# Allegro board ECBMCU201MPC_VER_B_Allegro.brd
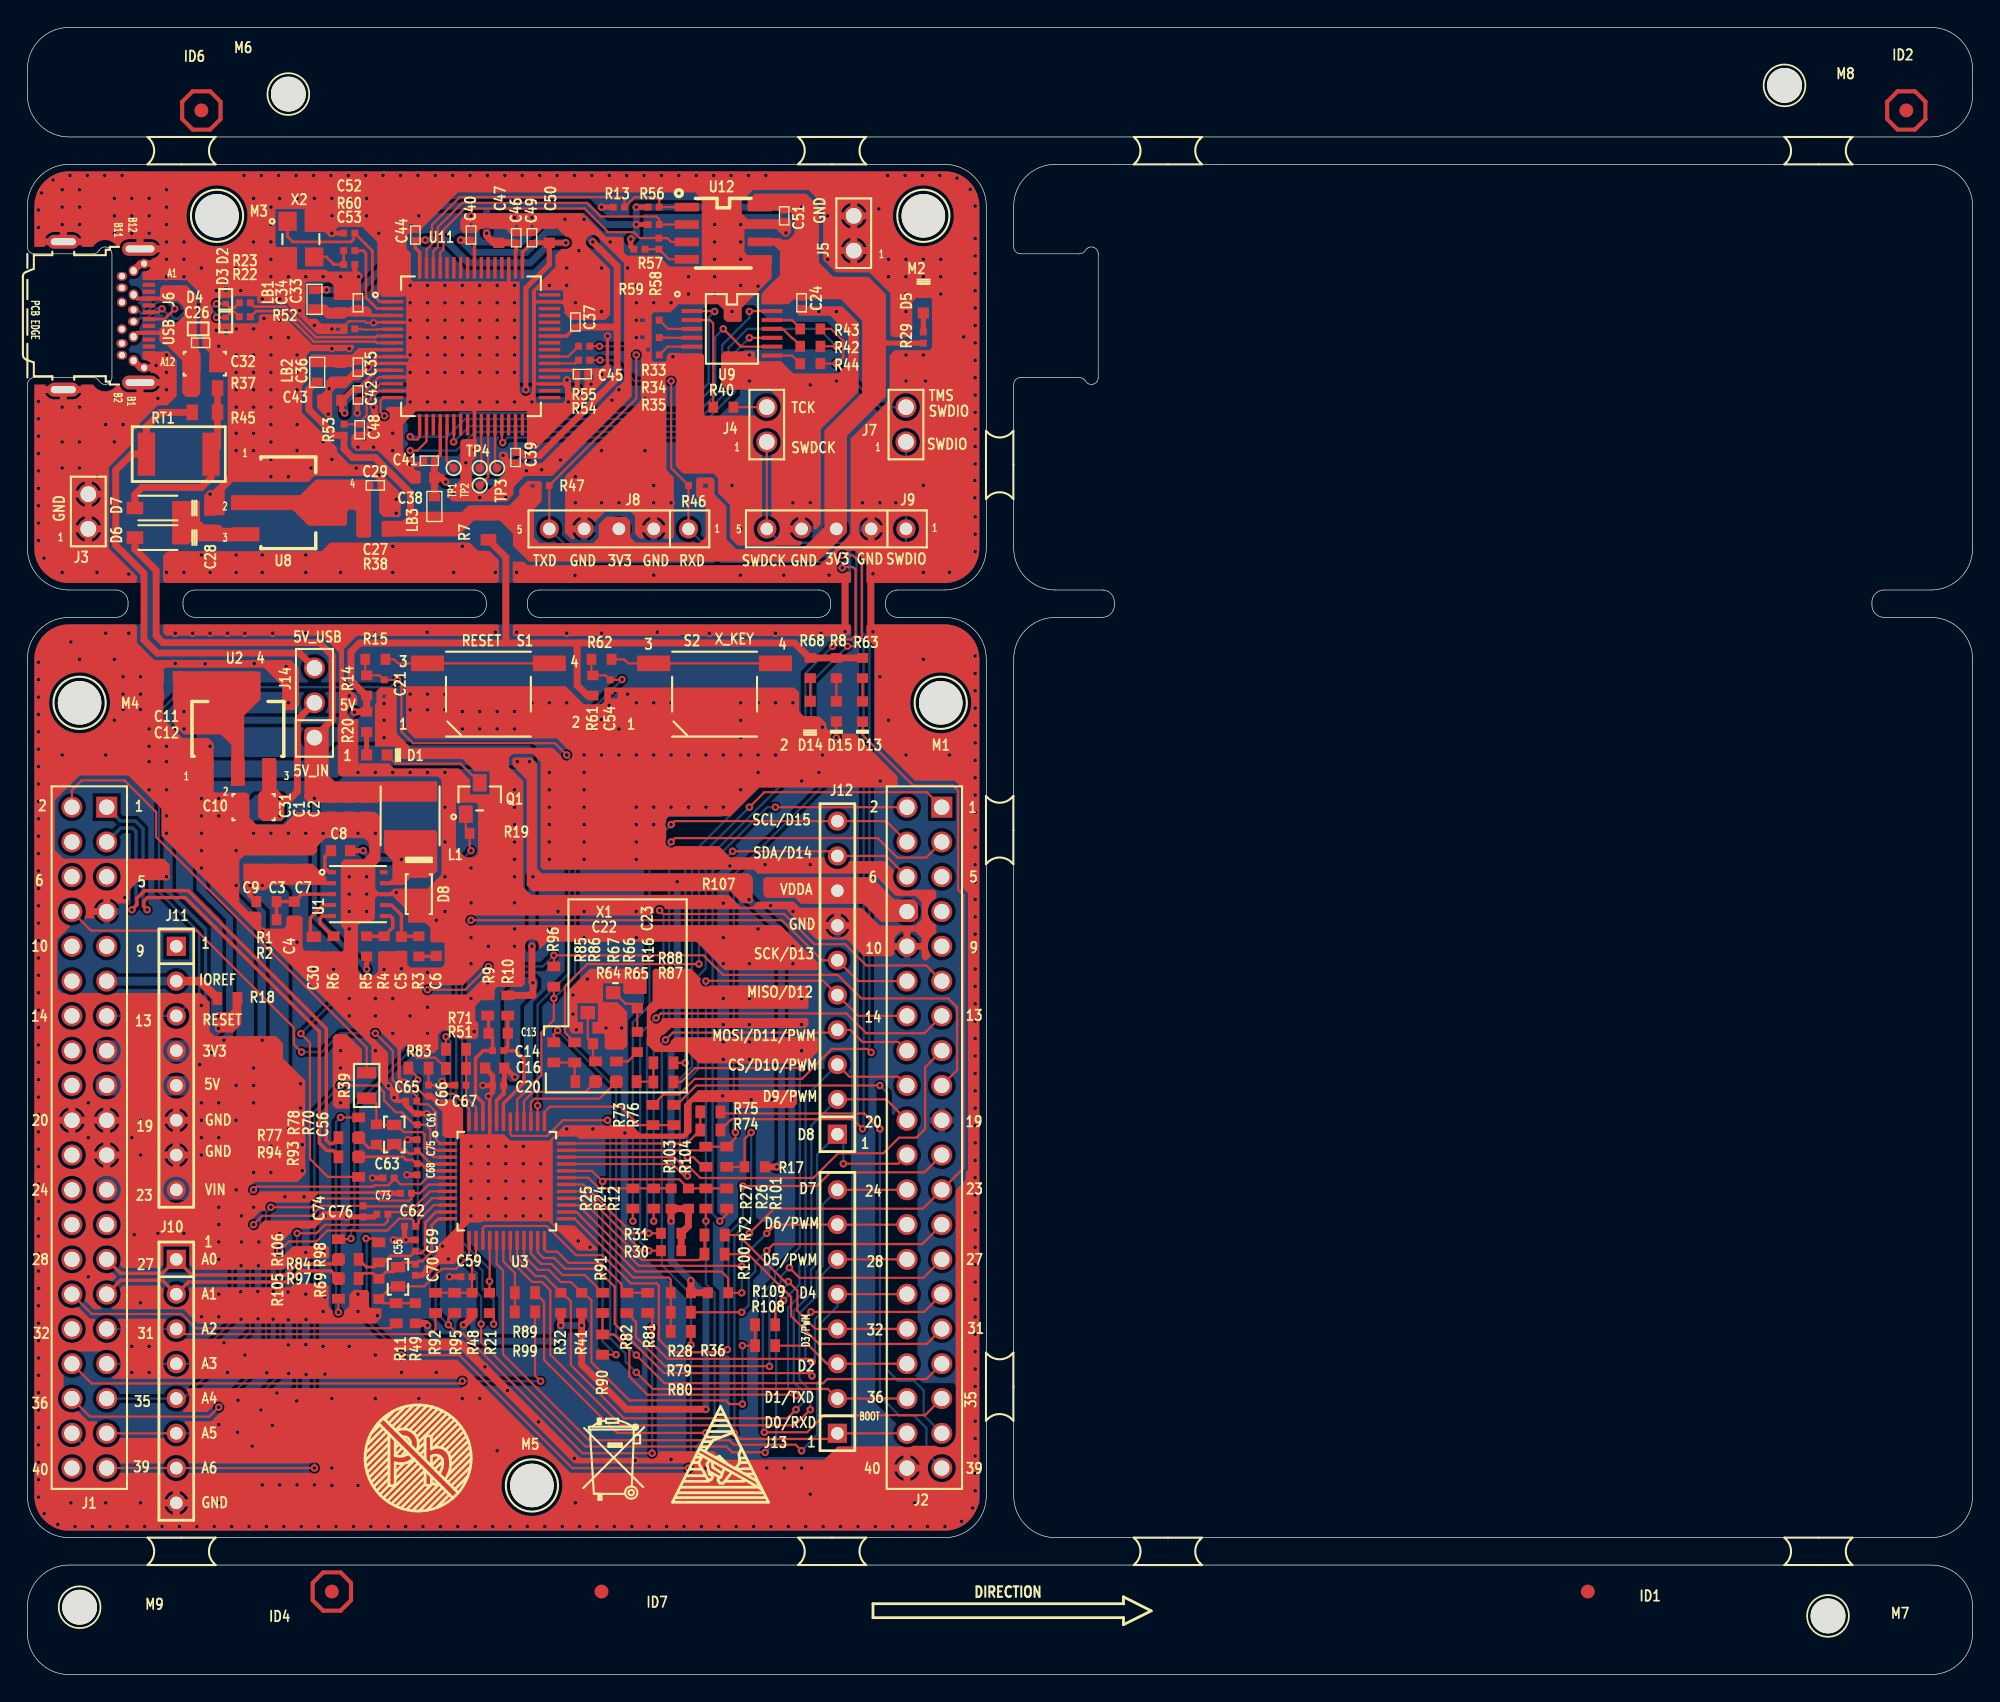
[diagram p0: board, top side]
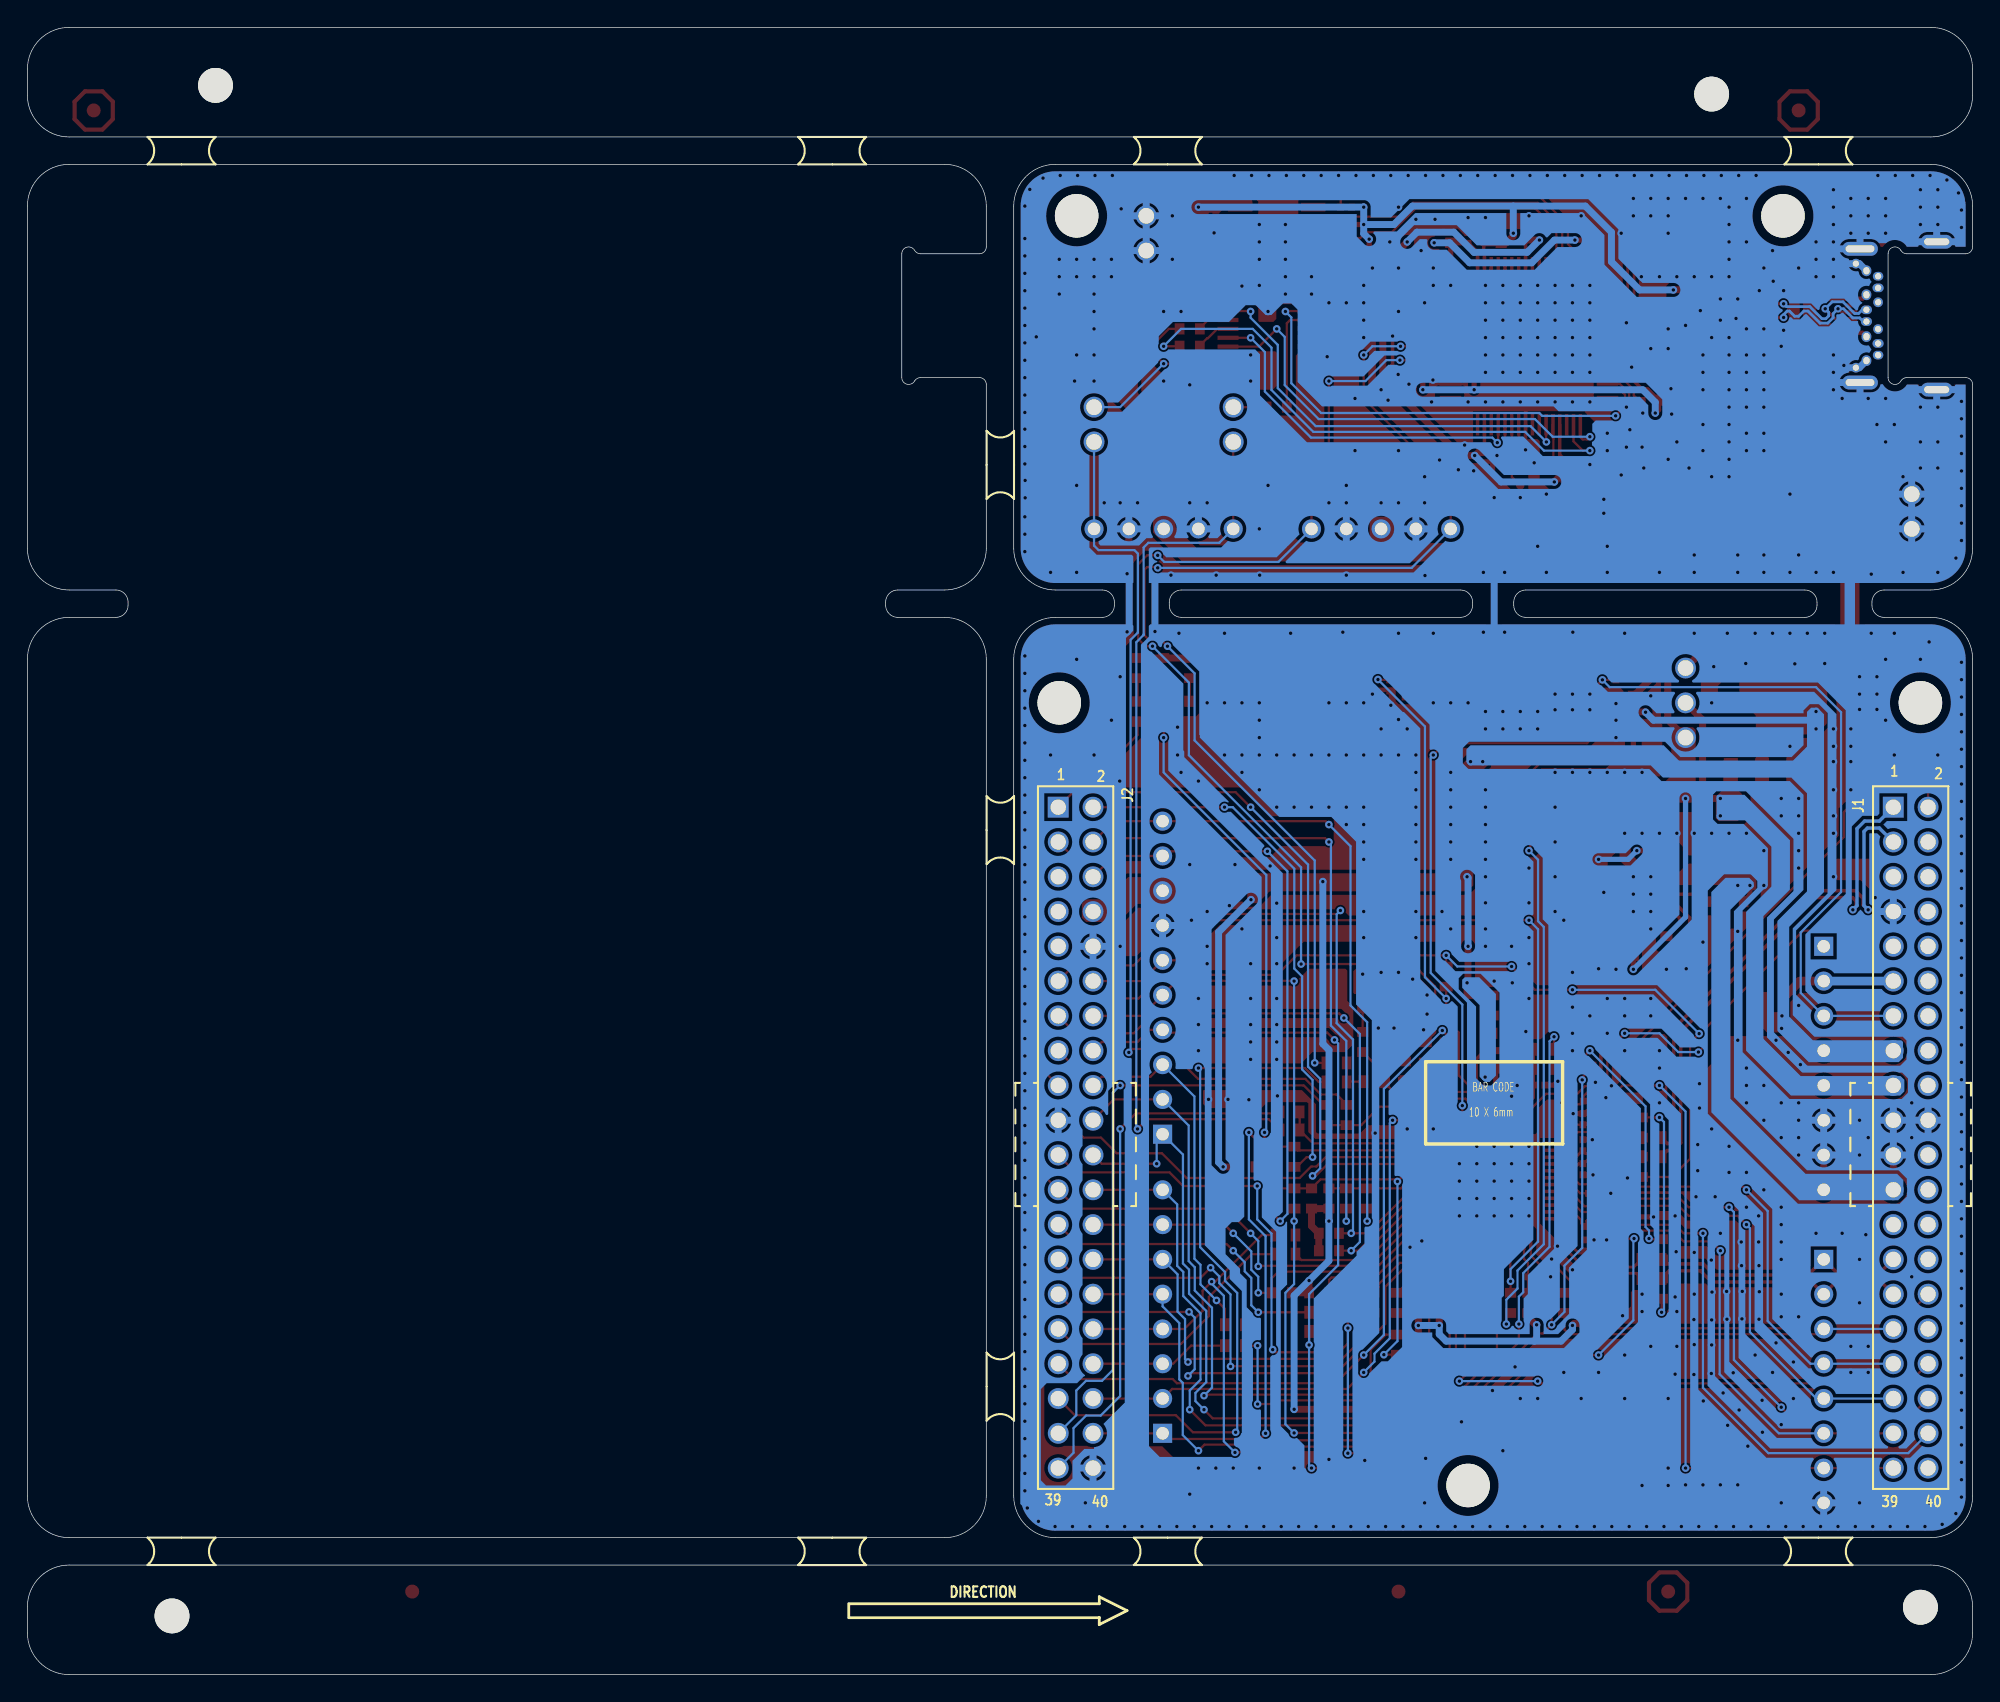
[diagram p1: board, bottom side, seen from below]

Outline 142 x 120.28 mm; copper layers: TOP, BOTTOM. Coordinates in mm from the lower left corner of the outline.
Outline path: 0,117.23 arc(0.89,119.39) 3.05,120.28 138.95,120.28 arc(141.11,119.39) 142,117.23 142,115.33 arc(141.11,113.17) 138.95,112.28 3.05,112.28 arc(0.89,113.17) 0,115.33 0,117.23 ; 0,107.23 arc(0.89,109.39) 3.05,110.28 66.95,110.28 arc(69.11,109.39) 70,107.23 70,82.25 arc(69.11,80.09) 66.95,79.2 63.54,79.2 arc(62.91,78.94) 62.65,78.31 62.65,78.09 arc(62.91,77.46) 63.54,77.2 66.95,77.2 arc(69.11,76.31) 70,74.15 70,13.05 arc(69.11,10.89) 66.95,10 3.05,10 arc(0.89,10.89) 0,13.05 0,74.15 arc(0.89,76.31) 3.05,77.2 6.46,77.2 arc(7.09,77.46) 7.35,78.09 7.35,78.31 arc(7.09,78.94) 6.46,79.2 3.05,79.2 arc(0.89,80.09) 0,82.25 0,94.2 arc(0.15,94.56) 0.51,94.71 4.8,94.71 arc(5.05,94.64) 5.24,94.46 arc(5.8,94.23) 6.17,94.71 6.17,103.75 arc(5.8,104.23) 5.24,104 arc(5.05,103.82) 4.8,103.75 0.51,103.75 arc(0.15,103.9) 0,104.26 0,107.23 ; 0,4.95 0,3.05 arc(0.89,0.89) 3.05,0 138.95,0 arc(141.11,0.89) 142,3.05 142,4.95 arc(141.11,7.11) 138.95,8 3.05,8 arc(0.89,7.11) 0,4.95 ; 11.36,78.31 11.36,78.09 arc(11.62,77.46) 12.25,77.2 32.61,77.2 arc(33.24,77.46) 33.5,78.09 33.5,78.31 arc(33.24,78.94) 32.61,79.2 12.25,79.2 arc(11.62,78.94) 11.36,78.31 ; 36.5,78.31 36.5,78.09 arc(36.76,77.46) 37.39,77.2 57.75,77.2 arc(58.38,77.46) 58.64,78.09 58.64,78.31 arc(58.38,78.94) 57.75,79.2 37.39,79.2 arc(36.76,78.94) 36.5,78.31 ; 72,107.23 arc(72.89,109.39) 75.05,110.28 138.95,110.28 arc(141.11,109.39) 142,107.23 142,82.25 arc(141.11,80.09) 138.95,79.2 135.54,79.2 arc(134.91,78.94) 134.65,78.31 134.65,78.09 arc(134.91,77.46) 135.54,77.2 138.95,77.2 arc(141.11,76.31) 142,74.15 142,13.05 arc(141.11,10.89) 138.95,10 75.05,10 arc(72.89,10.89) 72,13.05 72,74.15 arc(72.89,76.31) 75.05,77.2 78.46,77.2 arc(79.09,77.46) 79.35,78.09 79.35,78.31 arc(79.09,78.94) 78.46,79.2 75.05,79.2 arc(72.89,80.09) 72,82.25 72,94.2 arc(72.15,94.56) 72.51,94.71 76.8,94.71 arc(77.05,94.64) 77.24,94.46 arc(77.8,94.23) 78.17,94.71 78.17,103.75 arc(77.8,104.23) 77.24,104 arc(77.05,103.82) 76.8,103.75 72.51,103.75 arc(72.15,103.9) 72,104.26 72,107.23

## Design rules (mm)
net group DIFFPAIR0: nets USB_DN USB_DP
net group DIFFPAIR1: nets DN DP
net group DIFFPAIR2: nets J1_27 J1_29
net group DIFFPAIR3: nets J1_1 J1_3

## Placement (name value [footprint] x y rotation side)
C1  10uF  [SC0603-TD]  23.44 63.34 90 top
C2  100nF  [SC0603-TC]  24.77 63.34 90 top
C3  4.7uF  [VEH-SC0805-TD]  18.41 59.53 270 top
C4  100nF  [SC0603-TC]  19.48 55.75 90 top
C5  100pF  [SC0603-TC]  27.3 53.18 90 top
C6  4.7nF  [SC0603-TC]  29.84 53.18 270 top
C7  100nF  [SC0603-TC]  20.32 59.53 270 top
C8  100nF  [SC0603-TC]  22.86 60.16 0 top
C9  4.7uF  [VEH-SC0805-TD]  16.51 59.53 270 top
C10  10uF  [SC0805D]  16.51 63.34 0 top
C11  10uF  [SC0603-TD]  10.29 72.86 0 top
C12  22nF  [SC0603-TD]  10.29 71.47 0 top
C13  10uF  [SC0603-TD]  34.36 46.83 180 top
C14  100nF  [SC0402]  34.36 45.56 180 top
C16  10uF  [SC0603-TD]  34.11 44.29 180 top
C20  100nF  [SC0402]  34.36 43.02 180 top
C21  100nF  [SC0402]  26.04 72.23 270 top
C22  27pF/NC  [SC0603-TD]  41.98 46.07 180 top
C23  27pF/NC  [SC0603-TD]  44.52 49.37 270 top
C24  100nF  [HSC0402-TA]  56.52 100.17 270 top
C26  100nF  [HSC0402-TA]  12.64 97.25 0 top
C27  10uF  [SC0603-TD]  25.4 85.56 0 top
C28  10uF/25V/0603  [SC0603-TD]  13.34 84.29 90 top
C29  100nF  [HSC0402-TA]  25.4 86.83 0 top
C30  10nF  [SC0603B]  20.9 53.18 90 top
C31  10uF  [SC0603-TD]  22.12 63.34 90 top
C32  22uF/25V/0805  [SC0805B]  12.95 95.72 0 top
C33  100nF  [HSC0402-TA]  24.13 100.17 90 top
C34  10uF/25V/0603  [SC0603-TD]  22.86 100.17 90 top
C35  100nF  [HSC0402-TA]  24.13 95.47 270 top
C36  10uF/25V/0603  [SC0603-TD]  22.86 95.09 270 top
C37  100nF  [HSC0402-TA]  40.01 98.77 90 top
C38  10uF/25V/0603  [SC0603-TD]  29.01 87.42 180 top
C39  100nF  [HSC0402-TA]  35.63 88.87 270 top
C40  100nF  [HSC0402-TA]  32.38 105.12 90 top
C41  100nF  [HSC0402-TA]  29.34 88.64 180 top
C42  100nF  [HSC0402-TA]  24.13 93.44 270 top
C43  10uF/25V/0603  [SC0603-TD]  22.23 93.06 180 top
C44  100nF  [HSC0402-TA]  28.32 105.12 90 top
C45  100nF  [HSC0402-TA]  40.51 94.96 0 top
C46  100nF  [HSC0402-TA]  35.69 104.92 90 top
C47  10uF/25V/0603  [SC0603-TD]  34.42 105.25 90 top
C48  100nF  [HSC0402-TA]  24.26 90.9 270 top
C49  100nF  [HSC0402-TA]  36.83 104.92 90 top
C50  10uF/25V/0603  [SC0603-TD]  38.1 105.25 90 top
C51  100nF  [HSC0402-TA]  55.24 106.52 270 top
C52  30PF/0402  [SC0402]  23.5 105.25 180 top
C53  30PF/0402  [SC0402]  23.5 102.96 0 top
C54  100nF  [SC0402]  42.55 72.23 270 top
C55  47pF/NC  [SC0603-PA]  27.05 29.05 90 top
C56  47pF/NC  [SC0603-PA]  26.78 39.44 270 top
C59  1nF  [SC0402-PA]  32.05 29.05 180 top
C61  1nF  [SC0402-PA]  28.45 40.56 90 top
C62  1nF  [SC0402-PA]  27.94 32.73 180 top
C63  1nF  [SC0402-PA]  26.36 36.26 180 top
C65  1nF  [SC0402-PA]  28.01 41.88 180 top
C66  1nF  [SC0402-PA]  29.28 42.64 270 top
C67  1nF  [SC0402-PA]  31.62 43.05 180 top
C68  1nF/NC  [SC0402-PA]  28.45 36.9 270 top
C69  1nF/NC  [SC0402-PA]  28.32 31.34 90 top
C70  1nF/NC  [SC0402-PA]  28.32 29.56 270 top
C73  1nF  [SC0402-PA]  27.63 35.15 180 top
C74  1nF  [SC0402-PA]  24.51 33.83 270 top
C75  1nF/NC  [SC0402-PA]  28.45 38.65 90 top
C76  1nF  [SC0402-PA]  25.91 33.62 180 top
D1  LED  [SD0603-LED-A]  25.52 67.15 0 top
D2  S-LESD8LV5.0CT5G  [HSOD882]  14.48 100.42 270 top
D3  S-LESD8LV5.0CT5G  [HSOD882]  14.48 98.77 90 top
D4  NC  [HSOD882]  12.47 98.26 180 top
D5  LED  [SD0603-LED-A]  65.41 100.17 90 top
D6  D_A  [HSOD123A]  9.53 83.02 0 top
D7  D_A  [HSOD123A]  9.53 85.18 0 top
D8  D_A  [SD1107S]  28.57 56.99 90 top
D13  LED_GREEN/0603  [HSD0603-LED]  60.96 70.32 270 top
D14  LED  [SD0603-LED-A]  57.15 70.32 270 top
D15  LED_GREEN/0603  [HSD0603-LED]  59.05 70.32 270 top
ID1  none  [ID-BOARD-T]  113.91 6.06 0 top
ID2  PCB-MARKPOINT  [ID-BOARD]  137.16 114.22 0 top
ID4  PCB-MARKPOINT  [ID-BOARD]  22.23 6.06 0 top
ID6  PCB-MARKPOINT  [ID-BOARD]  12.7 114.22 0 top
ID7  none  [ID-BOARD-T]  41.91 6.06 0 top
J1  86-105-04002-1  [RHEAD0220-100-100T-D]  4.52 39.21 270 bottom
J2  86-105-04002-1  [RHEAD0220-100-100T-D]  65.48 39.21 270 bottom
J3  WH254-02-230_126-G-S  [SIP-2P]  4.45 84.93 90 top
J4  WH254-02-230_126-G-S  [SIP-2P]  53.98 91.28 90 top
J5  WH254-02-230_126-G-S  [SIP-2P]  60.33 105.25 90 top
J6  124019502112A  [RUSB24-050-1009E]  4.42 99.23 270 top
J7  WH254-02-230_126-G-S  [SIP-2P]  64.14 91.28 90 top
J8  WH254-05-230_126-G-S  [SIP-5P]  48.26 83.66 180 top
J9  WH254-05-230_126-G-S  [SIP-5P]  64.14 83.66 180 top
J10  1127-081-10-2  [SIP-8P]  10.87 21.43 270 top
J11  1127-081-10-2  [SIP-8P]  10.87 44.29 270 top
J12  1201-101-01-2  [SIP-10P]  59.13 50.89 90 top
J13  1127-081-10-2  [SIP-8P]  59.13 26.51 90 top
J14  WH254-03-240_157-G-S  [SIP-3P]  20.95 70.96 90 top
L1  6.8uH  [SPL0404X]  27.94 62.7 90 top
LB1  120ohm/2A/0603  [HSL0603-TB]  20.95 100.42 270 top
LB2  120ohm/2A/0603  [HSL0603-TB]  21.16 95.09 90 top
LB3  120ohm/2A/0603  [HSL0603-TB]  29.71 85.3 90 top
M1  ICT-LOCATING-POINT  [HOLE125]  66.67 70.96 0 top
M2  ICT-LOCATING-POINT  [HOLE125]  65.41 106.52 0 top
M3  ICT-LOCATING-POINT  [HOLE125]  13.84 106.52 0 top
M4  ICT-LOCATING-POINT  [HOLE125]  3.81 70.96 0 top
M5  ICT-LOCATING-POINT  [HOLE125]  36.83 13.81 0 top
M6  RIVET-HOLE100-R2R5  [HOLE100]  19.05 115.41 0 top
M7  RIVET-HOLE100-R2R5  [HOLE100]  131.44 4.28 0 top
M8  RIVET-HOLE100-R2R5  [HOLE100]  128.27 116.04 0 top
M9  RIVET-HOLE100-R2R5  [HOLE100]  3.81 4.92 0 top
NOREF  -  []  43.61 10 90 top
NOREF#2  -  [unnamed#2]  11.25 111.28 0 top
NOREF#3  -  []  0 38.98 0 top
NOREF#4  -  []  29.02 79.2 0 top
NOREF#5  -  []  49.91 15.59 0 top
NOREF#6  -  [unnamed#2]  70.98 21.03 270 top
NOREF#7  -  []  24.53 0 90 top
NOREF#8  -  [unnamed#2]  70.98 61.67 270 top
NOREF#9  -  []  0 50.55 0 top
NOREF#10  -  [unnamed#2]  130.75 111.28 180 top
NOREF#11  -  []  45.34 15.84 0 top
NOREF#12  -  [unnamed#2]  70.98 88.34 270 top
NOREF#13  -  []  28.52 15.82 0 top
NOREF#14  -  [unnamed#2]  83.25 9 0 top
NOREF#15  -  [unnamed#2]  58.75 111.28 180 top
NOREF#16  -  [unnamed#2]  130.75 9 180 top
NOREF#17  -  []  50.92 79.2 0 top
NOREF#18  -  [unnamed#2]  11.25 9 0 top
NOREF#19  -  [unnamed#2]  58.75 9 180 top
NOREF#20  -  [unnamed#2]  83.25 111.28 0 top
NOREF#21  -  []  71.88 4.67 0 top
NOREF#22  -  []  34.92 41.75 180 bottom
Q1  NPN-BEC  [SOT23]  33.02 63.97 0 top
R1  100k  [SR0603-TB]  17.45 56.44 0 top
R2  18k  [SR0603-TB]  17.45 55.12 0 top
R3  18k  [SR0603-TB]  28.57 53.18 90 top
R4  12k  [SR0603-TB]  26.04 53.18 90 top
R5  63.4k  [SR0603-TB]  24.77 53.18 270 top
R6  100k  [VEH-SR0603-TB]  22.35 53.18 90 top
R7  0ohm/NC  [SR0805-TB]  33.66 83.79 270 top
R8  510  [SR0603-TB]  59.05 73.5 270 top
R9  0  [SR0603B]  33.6 48.86 90 top
R10  0  [SR0603B]  35.06 48.86 270 top
R11  0  [SR0603B]  26.92 26.38 270 top
R12  4.7k  [SR0603-TB]  46.99 34.76 270 top
R13  10k/NC  [SR0402]  43.18 107.15 0 top
R14  10k  [SR0603]  24.77 72.23 270 top
R15  1k  [SR0603-TB]  25.4 74.13 180 top
R16  150/NC  [SR0603-TB]  44.52 46.19 270 top
R17  1k  [SR0603-TB]  53.09 37.08 0 top
R18  0  [SR0603B]  14.61 49.37 180 top
R19  10k  [SR0603]  33.02 61.43 180 top
R20  510  [SR0603-TB]  24.77 69.56 90 top
R21  4.7k  [SR0603-TB]  33.73 27.14 270 top
R22  0ohm  [SR0402]  15.88 99.15 180 top
R23  0ohm  [SR0402]  15.88 100.17 180 top
R24  0  [SR0603B]  45.72 34.76 270 top
R25  0/NC  [SR0603B]  44.2 34.76 270 top
R26  0  [SR0603B]  49.53 34.76 270 top
R27  4.7k  [SR0603-TB]  48.26 34.76 270 top
R28  4.7k/NC  [SR0603-TB]  47.7 27.88 0 top
R29  330ohm/0402  [SR0402]  65.41 97.63 90 top
R30  4.7k/NC  [SR0603-TB]  46.99 30.95 0 top
R31  4.7k/NC  [SR0603-TB]  46.99 32.22 0 top
R32  4.7k/NC  [SR0603-TB]  38.94 27.14 270 top
R33  10kohm/0402  [SR0402]  45.72 98.9 0 top
R34  10kohm/0402  [SR0402]  45.72 97.63 0 top
R35  10kohm/0402  [SR0402]  45.72 96.36 0 top
R36  4.7k/NC  [SR0603-TB]  50.42 27.88 180 top
R37  0ohm/0805  [SR0805-TB]  12.95 93.95 0 top
R38  0ohm/0805  [SR0805-TB]  25.4 83.66 0 top
R39  0  [SR0805B]  24.77 43.02 90 top
R40  100  [SR0603]  50.8 92.55 180 top
R41  4.7k/NC  [SR0603-TB]  40.46 27.14 270 top
R42  100  [SR0603]  57.15 96.99 0 top
R43  100  [SR0603]  57.15 98.26 0 top
R44  100  [SR0603]  57.15 95.72 0 top
R45  0ohm/NC  [SR0805-TB]  12.95 92.17 180 top
R46  10k  [SR0402]  48.67 86.83 0 top
R47  10k  [SR0402]  37.69 86.83 180 top
R48  4.7k/NC  [SR0603-TB]  32.46 27.14 270 top
R49  4.7k/NC  [SR0603-TB]  28.32 26.38 270 top
R51  0/NC  [SR0603B]  31.29 44.26 180 top
R52  12kohm/1%/0402  [SR0402]  23.5 98.26 180 top
R53  2.2kohm/0402  [SR0402]  23.11 90.9 270 top
R54  33ohm  [SR0402]  40.64 95.98 0 top
R55  33ohm  [SR0402]  40.64 96.99 0 top
R56  10k  [SR0402]  45.72 107.15 0 top
R57  10k  [SR0402]  45.72 105.88 0 top
R58  2.2k  [SR0402]  46.1 104.49 270 top
R59  10k  [SR0402]  44.68 104.08 0 top
R60  100ohm/0402  [SR0402]  23.5 103.98 0 top
R61  10k  [SR0603]  41.27 72.23 270 top
R62  1k  [SR0603-TB]  41.91 74.13 180 top
R63  510  [SR0603-TB]  60.96 73.5 270 top
R64  0  [SR0603B]  40.74 43.3 180 top
R65  0  [SR0603B]  43.74 43.3 0 top
R66  0/NC  [SR0603B]  43 44.04 90 top
R67  0/NC  [SR0603B]  41.48 44.04 90 top
R68  510  [SR0603-TB]  57.15 73.5 270 top
R69  10k/NC  [SR0603]  25.65 28.16 90 top
R70  10k/NC  [SR0603]  25.48 39.44 270 top
R71  0  [SR0603B]  31.29 45.66 180 top
R72  0/NC  [SR0603B]  50.16 32.1 0 top
R73  0  [SR0603B]  45.67 40.86 90 top
R74  0  [SR0603B]  49.86 39.77 0 top
R75  0  [SR0603B]  49.86 41.09 0 top
R76  0  [SR0603B]  47.19 40.86 90 top
R77  0  [SR0603B]  23.44 39.21 180 top
R78  0/NC  [SR0603B]  24.18 39.95 90 top
R79  0  [SR0603B]  47.7 26.46 0 top
R80  0/NC  [SR0603B]  47.7 25.06 0 top
R81  0/NC  [SR0603B]  45.29 27.14 270 top
R82  0  [SR0603B]  43.76 27.14 270 top
R83  0  [SR0603B]  28.55 44.29 180 top
R84  0  [SR0603B]  23.44 30.32 180 top
R85  0  [SR0603B]  38.43 45.43 90 top
R86  0  [SR0603B]  39.95 45.43 90 top
R87  0  [SR0603B]  46.43 43.27 0 top
R88  0  [SR0603B]  46.43 44.67 0 top
R89  0/NC  [SR0603B]  36.32 27.88 0 top
R90  0/NC  [SR0603B]  41.98 24.1 90 top
R91  0  [SR0603B]  41.98 27.14 270 top
R92  0  [SR0603B]  29.79 27.14 270 top
R93  0/NC  [SR0603B]  24.18 37.08 270 top
R94  0  [SR0603B]  23.44 37.81 180 top
R95  0/NC  [SR0603B]  31.19 27.14 270 top
R96  0  [SR0603B]  38.43 50.97 90 top
R97  0  [SR0603B]  23.44 28.92 180 top
R98  0/NC  [SR0603B]  25.65 30.83 90 top
R99  0  [SR0603B]  36.32 26.48 0 top
R100  0  [SR0603B]  50.16 30.7 0 top
R101  0/NC  [SR0603B]  51.05 34.76 270 top
R103  0  [SR0603B]  49.53 37.81 270 top
R104  0/NC  [SR0603B]  51.05 37.81 270 top
R105  0/NC  [SR0603B]  22.71 28.19 90 top
R106  0/NC  [SR0603B]  22.71 31.06 270 top
R107  0  [SR0603B]  53.34 57.62 0 top
R108  0  [SR0603B]  53.85 24.02 0 top
R109  0/NC  [SR0603B]  53.85 25.54 0 top
RT1  RT  [SF1913]  11.05 89.12 180 top
S1  TSF-065001F-160-T10-CT  [SSW-PUSH]  33.66 71.59 0 top
S2  TSF-065001F-160-T10-CT  [SSW-PUSH]  50.16 71.59 0 top
TP1  TESTPOINT-SMD  [TP24-SMD]  31.11 88.1 270 top
TP2  TESTPOINT-SMD  [TP24-SMD]  33.02 86.83 270 top
TP3  TESTPOINT-SMD  [TP24-SMD]  34.29 88.1 270 top
TP4  TESTPOINT-SMD  [TP24-SMD]  33.02 88.1 270 top
U1  RTQ2965WGQW  [MLF10B-080-0404L]  24.13 56.99 270 top
U2  SGM2212H-33XKC3GTR  [SOT223A]  15.37 69.05 0 top
U3  LQFP48  [QFP48B-050-0707L]  35 36.03 270 top
U8  SGM2212H-33XKC3GTR  [SOT223A]  19.05 85.56 270 top
U9  74LVC125APW,118  [SOP14-26-173]  51.44 98.26 270 top
U11  FT2232HL  [QFP64M-050-1010L]  32.38 96.99 270 top
U12  M93C46-WMN6TP  [SOP8-50-150]  50.8 105.25 270 top
X1  NC  [HSX4-0302B]  41.83 49.07 180 top
X2  12MHz  [SX4-0303K]  19.96 104.82 270 top

## Library data of the parts
C1 C11-C13 C16 C22 C23 C27 C28 C31 C34 C36 C38 C43 C47 C50 = SC0603-TD
C2 C4-C8 = SC0603-TC
C3 C9 = VEH-SC0805-TD
C10 = SC0805D
C14 C20 C21 C52-C54 = SC0402
C24 C26 C29 C33 C35 C37 C39-C42 C44-C46 C48 C49 C51 = HSC0402-TA
C30 = SC0603B
C32 = SC0805B
C55 C56 = SC0603-PA
C59 C61-C63 C65-C70 C73-C76 = SC0402-PA
D1 D5 D14 = SD0603-LED-A
D2-D4 = HSOD882
D6 D7 = HSOD123A
D8 = SD1107S
D13 D15 = HSD0603-LED
ID1 ID7 = ID-BOARD-T
ID2 ID4 ID6 = ID-BOARD
J1 J2 = RHEAD0220-100-100T-D
J3-J5 J7 = SIP-2P
J6 = RUSB24-050-1009E
J8 J9 = SIP-5P
J10 J11 J13 = SIP-8P
J12 = SIP-10P
J14 = SIP-3P
L1 = SPL0404X
LB1-LB3 = HSL0603-TB
M1-M5 = HOLE125
M6-M9 = HOLE100
Q1 = SOT23
R1-R5 R8 R12 R15-R17 R20 R21 R27 R28 R30-R32 R36 R41 R48 R49 R62 R63 R68 = SR0603-TB
R6 = VEH-SR0603-TB
R7 R37 R38 R45 = SR0805-TB
R9-R11 R18 R24-R26 R51 R64-R67 R71-R101 R103-R109 = SR0603B
R13 R22 R23 R29 R33-R35 R46 R47 R52-R60 = SR0402
R14 R19 R40 R42-R44 R61 R69 R70 = SR0603
R39 = SR0805B
RT1 = SF1913
S1 S2 = SSW-PUSH
TP1-TP4 = TP24-SMD
U1 = MLF10B-080-0404L
U2 U8 = SOT223A
U3 = QFP48B-050-0707L
U9 = SOP14-26-173
U11 = QFP64M-050-1010L
U12 = SOP8-50-150
X1 = HSX4-0302B
X2 = SX4-0303K

## Footprints (pads in the part's own frame, mm; a bottom-side part is the same pattern mirrored in y, then rotated)
HOLE100
  round 2.54 hole 2.54 unplated: (0,0)
HOLE125
  round 3.175 hole 3.175 unplated: (0,0)
HSC0402-TA
  rect 0.432x0.508 smd: 1(-0.368,0) 2(0.368,0)
HSD0603-LED
  rect 0.762x0.813 smd: 1(-0.737,0) 2(0.737,0)
HSL0603-TB
  rect 0.635x0.813 smd: 1(-0.699,0) 2(0.699,0)
HSOD123A
  rect 1.219x0.914 smd: 1(1.676,0) 2(-1.676,0)
HSOD882
  rect 0.406x0.483 smd: 1(-0.325,0) 2(0.325,0)
HSX4-0302B
  rect 1.067x0.965 smd: 1(-0.927,-0.727) 2(0.927,-0.727) 3(0.927,0.727) 4(-0.927,0.727)
ID-BOARD
  round 1.016 smd: 1(0,0)
ID-BOARD-T
  round 1.016 smd: 1(0,0)
MLF10B-080-0404L
  rect 0.305x0.559 smd: 1(-1.6,-1.879) 2(-0.8,-1.879) 3(0,-1.879) 4(0.8,-1.879) 5(1.6,-1.879) 6(1.6,1.879) 7(0.8,1.879) 8(0,1.879) 9(-0.8,1.879) 10(-1.6,1.879)
  rect 3.302x2.489 smd: 11(0,0)
QFP48B-050-0707L
  rect 0.254x1.372 smd: 1(-2.75,-4.332) 2(-2.25,-4.332) 3(-1.75,-4.332) 4(-1.25,-4.332) 5(-0.75,-4.332) 6(-0.25,-4.332) 7(0.25,-4.332) 8(0.75,-4.332) 9(1.25,-4.332) 10(1.75,-4.332) 11(2.25,-4.332) 12(2.75,-4.332) 25(2.75,4.332) 26(2.25,4.332) 27(1.75,4.332) 28(1.25,4.332) 29(0.75,4.332) 30(0.25,4.332) 31(-0.25,4.332) 32(-0.75,4.332) 33(-1.25,4.332) 34(-1.75,4.332) 35(-2.25,4.332) 36(-2.75,4.332)
  rect 1.372x0.254 smd: 13(4.332,-2.75) 14(4.332,-2.25) 15(4.332,-1.75) 16(4.332,-1.25) 17(4.332,-0.75) 18(4.332,-0.25) 19(4.332,0.25) 20(4.332,0.75) 21(4.332,1.25) 22(4.332,1.75) 23(4.332,2.25) 24(4.332,2.75) 37(-4.332,2.75) 38(-4.332,2.25) 39(-4.332,1.75) 40(-4.332,1.25) 41(-4.332,0.75) 42(-4.332,0.25) 43(-4.332,-0.25) 44(-4.332,-0.75) 45(-4.332,-1.25) 46(-4.332,-1.75) 47(-4.332,-2.25) 48(-4.332,-2.75)
QFP64M-050-1010L
  rect 0.254x1.575 smd: 1(-3.75,-5.73) 2(-3.25,-5.73) 3(-2.75,-5.73) 4(-2.25,-5.73) 5(-1.75,-5.73) 6(-1.25,-5.73) 7(-0.75,-5.73) 8(-0.25,-5.73) 9(0.25,-5.73) 10(0.75,-5.73) 11(1.25,-5.73) 12(1.75,-5.73) 13(2.25,-5.73) 14(2.75,-5.73) 15(3.25,-5.73) 16(3.75,-5.73) 33(3.75,5.73) 34(3.25,5.73) 35(2.75,5.73) 36(2.25,5.73) 37(1.75,5.73) 38(1.25,5.73) 39(0.75,5.73) 40(0.25,5.73) 41(-0.25,5.73) 42(-0.75,5.73) 43(-1.25,5.73) 44(-1.75,5.73) 45(-2.25,5.73) 46(-2.75,5.73) 47(-3.25,5.73) 48(-3.75,5.73)
  rect 1.575x0.254 smd: 17(5.73,-3.75) 18(5.73,-3.25) 19(5.73,-2.75) 20(5.73,-2.25) 21(5.73,-1.75) 22(5.73,-1.25) 23(5.73,-0.75) 24(5.73,-0.25) 25(5.73,0.25) 26(5.73,0.75) 27(5.73,1.25) 28(5.73,1.75) 29(5.73,2.25) 30(5.73,2.75) 31(5.73,3.25) 32(5.73,3.75) 49(-5.73,3.75) 50(-5.73,3.25) 51(-5.73,2.75) 52(-5.73,2.25) 53(-5.73,1.75) 54(-5.73,1.25) 55(-5.73,0.75) 56(-5.73,0.25) 57(-5.73,-0.25) 58(-5.73,-0.75) 59(-5.73,-1.25) 60(-5.73,-1.75) 61(-5.73,-2.25) 62(-5.73,-2.75) 63(-5.73,-3.25) 64(-5.73,-3.75)
RHEAD0220-100-100T-D
  rect 1.524x1.524 hole 1.118: 1(-24.13,-1.27)
  round 1.524 hole 1.118: 2(-24.13,1.27) 3(-21.59,-1.27) 4(-21.59,1.27) 5(-19.05,-1.27) 6(-19.05,1.27) 7(-16.51,-1.27) 8(-16.51,1.27) 9(-13.97,-1.27) 10(-13.97,1.27) 11(-11.43,-1.27) 12(-11.43,1.27) 13(-8.89,-1.27) 14(-8.89,1.27) 15(-6.35,-1.27) 16(-6.35,1.27) 17(-3.81,-1.27) 18(-3.81,1.27) 19(-1.27,-1.27) 20(-1.27,1.27) 21(1.27,-1.27) 22(1.27,1.27) 23(3.81,-1.27) 24(3.81,1.27) 25(6.35,-1.27) 26(6.35,1.27) 27(8.89,-1.27) 28(8.89,1.27) 29(11.43,-1.27) 30(11.43,1.27) 31(13.97,-1.27) 32(13.97,1.27) 33(16.51,-1.27) 34(16.51,1.27) 35(19.05,-1.27) 36(19.05,1.27) 37(21.59,-1.27) 38(21.59,1.27) 39(24.13,-1.27) 40(24.13,1.27)
RUSB24-050-1009E
  rect 0.305x0.914 smd: 1(-2.75,4.45) 2(-2.25,4.45) 3(-1.75,4.45) 4(-1.25,4.45) 5(-0.75,4.45) 6(-0.25,4.45) 7(0.25,4.45) 8(0.75,4.45) 9(1.25,4.45) 10(1.75,4.45) 11(2.25,4.45) 12(2.75,4.45)
  oval 0.787x0.711 hole 0.533x0.457: 13(3.28,3.33) 16(1.53,3.33) 21(-1.53,3.33) 24(-3.28,3.33)
  oval 0.635x0.762 hole 0.457: 14(2.88,2.48) 23(-2.88,2.48)
  oval 0.635x0.813 hole 0.457: 15(2.03,2.48) 18(0.43,3.33) 19(-0.43,3.33) 22(-2.03,2.48)
  round 0.711 hole 0.457: 17(0.98,2.48) 20(-0.98,2.48) 25(-3.8,4.1) 26(3.8,4.1)
  oval 1.016x2.616 hole 0.508x2.108: 27(-4.88,3.799) 28(4.88,3.8)
  oval 1.016x2.337 hole 0.508x1.829: 29(-5.4,-1.8) 30(5.4,-1.8)
SC0402
  rect 0.508x0.508 smd: 1(-0.406,0) 2(0.406,0)
SC0402-PA
  rect 0.508x0.508 smd: 1(-0.406,0) 2(0.406,0)
SC0603-PA
  rect 0.762x1.041 smd: 1(-0.699,0) 2(0.699,0)
SC0603-TC
  rect 0.762x0.813 smd: 1(-0.699,0) 2(0.699,0)
SC0603-TD
  rect 0.762x0.813 smd: 1(-0.699,0) 2(0.699,0)
SC0603B
  rect 0.762x1.041 smd: 1(-0.699,0) 2(0.699,0)
SC0805B
  rect 0.991x1.27 smd: 1(-0.813,0) 2(0.813,0)
SC0805D
  rect 0.991x1.448 smd: 1(-0.813,0) 2(0.813,0)
SD0603-LED-A
  rect 0.813x0.813 smd: 1(-0.75,0) 2(0.75,0)
SD1107S
  rect 0.864x1.118 smd: 1(1.626,0) 2(-1.626,0)
SF1913
  rect 1.27x3.15 smd: 1(-2.362,0) 2(2.362,0)
SIP-2P
  round 1.524 hole 1.143: 1(-1.27,0) 2(1.27,0)
SIP-3P
  round 1.524 hole 1.143: 1(-2.54,0) 2(0,0) 3(2.54,0)
SIP-5P
  round 1.397 hole 0.914: 1(0,0) 2(2.54,0) 3(5.08,0) 4(7.62,0) 5(10.16,0)
SIP-8P
  rect 1.397x1.397 hole 0.914: 1(-8.89,0)
  round 1.397 hole 0.914: 2(-6.35,0) 3(-3.81,0) 4(-1.27,0) 5(1.27,0) 6(3.81,0) 7(6.35,0) 8(8.89,0)
SIP-10P
  rect 1.397x1.397 hole 0.914: 1(-11.43,0)
  round 1.397 hole 0.914: 2(-8.89,0) 3(-6.35,0) 4(-3.81,0) 5(-1.27,0) 6(1.27,0) 7(3.81,0) 8(6.35,0) 9(8.89,0) 10(11.43,0)
SOP8-50-150
  rect 0.635x1.778 smd: 1(-1.905,-2.667) 2(-0.635,-2.667) 3(0.635,-2.667) 4(1.905,-2.667) 5(1.905,2.667) 6(0.635,2.667) 7(-0.635,2.667) 8(-1.905,2.667)
SOP14-26-173
  rect 0.305x1.524 smd: 1(-1.951,-2.921) 2(-1.3,-2.921) 3(-0.65,-2.921) 4(0,-2.921) 5(0.65,-2.921) 6(1.3,-2.921) 7(1.951,-2.921) 8(1.951,2.921) 9(1.3,2.921) 10(0.65,2.921) 11(0,2.921) 12(-0.65,2.921) 13(-1.3,2.921) 14(-1.951,2.921)
SOT23
  rect 1.016x1.27 smd: 1(-1.016,-1.143) 2(1.016,-1.143) 3(0,1.143)
SOT223A
  rect 1.016x2.032 smd: 1(-2.286,-3.15) 2(0,-3.15) 3(2.286,-3.15)
  rect 3.302x2.032 smd: 4(0,3.15)
SPL0404X
  rect 1.448x3.81 smd: 1(-1.775,0) 2(1.775,0)
SR0402
  rect 0.508x0.508 smd: 1(-0.406,0) 2(0.406,0)
SR0603
  rect 0.711x0.813 smd: 1(-0.737,0) 2(0.737,0)
SR0603-TB
  rect 0.711x0.813 smd: 1(-0.737,0) 2(0.737,0)
SR0603B
  rect 0.711x0.94 smd: 1(-0.737,0) 2(0.737,0)
SR0805-TB
  rect 0.838x1.143 smd: 1(-0.927,0) 2(0.927,0)
SR0805B
  rect 0.838x1.397 smd: 1(-0.927,0) 2(0.927,0)
SSW-PUSH
  rect 2.413x1.143 smd: 1(-4.445,-2.25) 2(4.445,-2.25) 3(-4.445,2.25) 4(4.445,2.25)
SX4-0303K
  rect 1.397x1.346 smd: 1(-1.298,-0.973) 2(1.298,-0.973) 3(1.298,0.973) 4(-1.298,0.973)
TP24-SMD
  round 0.61 smd: 1(0,0)
unnamed#2
  round 0 smd: 1(-0.027,1.163)
VEH-SC0805-TD
  rect 0.991x1.448 smd: 1(-0.813,0) 2(0.813,0)
VEH-SR0603-TB
  rect 0.711x0.889 smd: 1(-0.737,0) 2(0.737,0)

## Nets
3V3: C11.2 C12.2 C16.1 C20.1 J1.15 J11.4(TP-4) R7.2 R8.1 R10.1 R12.2 R14.2 R17.2 R18.1 R20.2 R27.2 R28.2 R30.2 R31.2 R32.2 R36.2 R41.2 R48.2 R49.2 R61.2 R63.1 R68.1 R107.1 U2.2(TP-2) U2.4(TP-4) U3.44
3V3_D: C24.1 C46.1 C47.1 C51.1 J8.3 J9.3 LB1.1 LB2.1 LB3.1 R7.1 R29.1 R38.2 R46.2 R47.2 R53.2 R56.1 R57.1 R59.1 U9.14(TP-14) U11.50 U12.6(TP-6) U12.8(TP-8)
5V: C10.2 J1.17 J11.5(TP-5) J14.2 U2.3(TP-3)
5V_IN: C1.2 C2.2 C31.2 D6.2 J14.1 L1.2 R5.2
5V_USB: D7.2 R37.2 R45.1 RT1.1(TP-1)
5V_USB_D: J14.3 R45.2 RT1.2(TP-2)
GND: C1.1 C2.1 C3.1 C4.1 C5.1 C6.1 C7.1 C9.1 C10.1 C11.1 C12.1 C16.2 C20.2 C21.2 C22.1 C23.1 C24.2 C26.2 C27.2 C28.2 C29.2 C30.1 C31.1 C32.2 C33.2 C34.2 C35.2 C36.2 C37.2 C38.2 C39.2 C40.2 C41.2 C42.2 C43.2 C44.2 C45.2 C46.2 C47.2 C48.2 C49.2 C50.2 C51.2 C52.2 C53.2 C54.2 C59.2 C61.2 C62.2 C63.2 C65.2 C66.2 C67.2 C68.2 C69.2 C70.2 C73.2 C74.2 C75.2 C76.2 D2.1 D3.1 D4.1 D5.2 D8.2 D14.2 J1.7 J1.19 J1.20 J1.21 J2.10 J2.19 J2.40 J3.1 J3.2 J5.1 J5.2 J6.1 J6.12 J6.13 J6.24 J6.25 J6.26 J6.27 J6.28 J6.29 J6.30 J8.2 J8.4 J9.2 J9.4 J10.8(TP-8) J11.6(TP-6) J11.7(TP-7) J12.7(TP-7) Q1.2 R2.1 R4.1 R6.1 R9.2 R13.1 R19.1 R33.1 R34.1 R35.1 R52.2 S1.1 S1.2 S2.1 S2.2 U1.8 U1.11 U2.1(TP-1) U3.45 U8.1(TP-1) U9.1(TP-1) U9.7(TP-7) U11.1 U11.5 U11.10 U11.11 U11.13 U11.15 U11.25 U11.35 U11.47 U11.51 U12.5(TP-5) U12.7(TP-7) X1.2 X1.4 X2.2 X2.4
GND1: C13.2 C14.2 R9.1 U3.46
VCCIO: C37.1 C38.1 C39.1 C40.1 C41.1 LB3.2 U11.20 U11.31 U11.42 U11.56
VDD: C13.1 C14.1 R10.2 U3.43
VDDA: J2.8 J12.8(TP-8) R107.2
VIN: C3.2 C7.2 C9.2 J1.23 J11.8(TP-8) R1.1 U1.2
DN: D2.2 J6.7 J6.19 R23.2
DP: D3.2 J6.6 J6.18 R22.2
EECLK: R57.2 U11.62 U12.2(TP-2)
EECS: R13.2 R56.2 U11.63 U12.1(TP-1)
EEDATA: R58.1 U11.61 U12.3(TP-3)
FT_TCK: U9.2(TP-2) U11.16
FT_TDI: U9.9(TP-9) U11.17
FT_TDO: R42.2 U11.18
FT_TRST: TP4.1 U11.26
GPIO0_0: R74.1 R75.1 U3.36
GPIO0_1: R73.1 R76.1 U3.37
GPIO0_3: R65.1 R66.1 U3.39
GPIO0_3_D: R65.2 R87.1 R88.1
GPIO0_4: R64.1 R67.1 U3.40
GPIO0_4_D: R64.2 R85.1 R86.1
GPIO0_5: C67.1 R51.1 R71.1 U3.47
GPIO0_6: C66.1 R83.1 U3.48
GPIO0_7: C65.1 J1.8 U3.1
GPIO1_0: D13.2 J2.23 U3.27
GPIO1_1: R72.1 R100.1 U3.28
GPIO1_2: J2.36 J13.2(TP-2) U3.42
GPIO1_3: J2.30 J13.5(TP-5) U3.17
GPIO1_4: R89.1 R99.1 U3.18
GPIO1_5: C69.1 R84.1 R98.1 U3.11
GPIO1_6: C55.2 C70.1 R69.2 R97.1 U3.12
GPIO1_7: C55.1 R11.1 R49.1 R69.1 U3.13
GPIO1_7_C: J1.30 R11.2
GPIO2_0: R12.1 R24.1 R25.1 U3.31
GPIO2_1: R26.1 R27.1 R90.1 R101.1 U3.32
GPIO2_2: J2.15 U3.34
GPIO2_3: D15.2 R103.1 R104.1 U3.35
GPIO2_4: C54.1 R61.1 R62.2 R96.1 U3.41
GPIO2_5: C68.1 R93.1 R94.1 U3.5
GPIO2_6: C56.2 C75.1 R70.2 R77.1 R78.1 U3.4
GPIO2_7: C56.1 R39.1 R70.1 U3.3
GPIO2_7_C: J1.2 R39.2
GPIO3_0: J2.24 J13.8(TP-8) U3.19
GPIO3_1: J2.22 J12.1(TP-1) R32.1 U3.20
GPIO3_2: R41.1 R108.1 R109.1 U3.21
GPIO3_3: R91.1 U3.22
GPIO3_4: J2.13 R30.1 U3.29
GPIO3_5: C76.1 J1.38 U3.9
GPIO3_6: C74.1 J1.35 J10.5(TP-5) U3.8
GPIO3_7: C73.1 J1.36 U3.7
GPIO4_0: J2.29 U3.23
GPIO4_1: R81.1 R82.1 U3.24
GPIO4_2: R28.1 R79.1 R80.1 U3.25
GPIO4_3: J2.26 J13.7(TP-7) R36.1 U3.26
GPIO4_4: J2.11 R31.1 U3.30
GPIO4_5: J2.21 U3.15
GPIO4_6: J2.12 J12.6(TP-6) R21.1 U3.16
GPIO4_7: C59.1 R48.1 R92.1 R95.1 U3.14
GPIO5_0: J2.1 U3.33
GPIO5_1: C61.1 J1.39 J10.7(TP-7) U3.2
GPIO5_2: C63.1 J1.33 J10.4(TP-4) U3.6
GPIO5_3: C62.1 J1.37 J10.6(TP-6) U3.10
GPIOH3: U9.10(TP-10) U11.29
GPIOL1: U9.13(TP-13) U11.22
IOREF: J1.11 J11.2(TP-2) R18.2
J1_1: J1.1 R94.2
J1_3: J1.3 R77.2
J1_27: J1.27 J10.1(TP-1) R84.2 R106.2
J1_29: J1.29 J10.2(TP-2) R97.2 R105.2
J1_31: J1.31 J10.3(TP-3) R92.2
J1_34: J1.34 R99.2
J2_2: J2.2 R103.2
J2_3: J2.3 R24.2
J2_4: J2.4 J12.10(TP-10) R25.2
J2_6: J2.6 J12.9(TP-9) R101.2
J2_14: J2.14 J12.5(TP-5) R26.2 R89.2
J2_16: J2.16 J12.4(TP-4) R80.2 R98.2
J2_17: J2.17 R93.2 R96.2
J2_18: J2.18 J12.3(TP-3) R109.2
J2_20: J2.20 J12.2(TP-2) R90.2 R91.2
J2_25: J2.25 R79.2
J2_27: J2.27 R82.2
J2_28: J2.28 J13.6(TP-6) R81.2 R83.2 R95.2
J2_31: J2.31 R100.2
J2_32: J2.32 J13.4(TP-4) R71.2 R72.2
J2_33: J2.33 R85.2
J2_34: J2.34 J13.3(TP-3) R108.2
J2_35: J2.35 R87.2
J2_37: J2.37 R76.2
J2_38: J2.38 J13.1(TP-1) R17.1 R104.2
J2_39: J2.39 R75.2
OSCI: C52.1 U11.2 X2.1
OSCO: R60.2 U11.3
RESET/GPIO0_2: C21.1 J1.13 J11.3(TP-3) R14.1 R15.2 U3.38
SWDCK: J4.1 J9.5 R74.2
SWDIO: J7.1 J9.1 R73.2
TCK: J4.2 R40.1
TMS_SWDIO: J7.2 R43.2 R44.2
UART_RX: J8.1 R46.1 R54.2 R86.2
UART_TX: J8.5 R47.1 R55.2 R88.2
USB_DN: R23.1 U11.7
USB_DP: R22.1 U11.8
VCORE: C42.1 C43.1 C44.1 C45.1 C49.1 C50.1 U11.12 U11.37 U11.49 U11.64
VPHY: C33.1 C34.1 LB1.2 U11.4
VPLL: C35.1 C36.1 LB2.2 U11.9
XTAL_IN: C22.2 R67.2 X1.3
XTAL_OUT: R16.2 R66.2
$2N18141: R6.2 U1.5
$2N18142: C30.2 U1.4
$2N18143: C6.2 R3.1
$2N18144: C8.1 U1.1
$2N18145: C8.2 D8.1 L1.1 U1.9
$2N18146: C4.2 R1.2 R2.2 U1.3
$2N18147: C5.2 R3.2 U1.7
$2N18148: R4.2 R5.1 U1.6
$3N11139: R62.1 S2.3 S2.4
$3N11447: C23.2 R16.1 X1.1
$3N15964: D13.1 R63.2
$3N16214: D14.1 R68.2
$3N17141: R15.1 S1.3 S1.4
$3N19681: D15.1 R8.2
$4N24839: D1.1 R20.1
$4N24840: Q1.1 R19.2 R21.2
$4N24842: D1.2 Q1.3
$4N90648: R78.2 R105.1
$4N91695: R51.2 R106.1
$5N6477: R40.2 U9.3(TP-3)
$5N6485: R44.1 U9.8(TP-8)
$5N6499: R43.1 U9.12(TP-12)
$5N6500: R42.1 U9.11(TP-11)
$5N6507: C26.1 C32.1 D4.2 J6.4 J6.9 J6.16 J6.21 R37.1
$5N6511: D5.1 R29.2
$5N6520: C28.1 D6.1 D7.1 U8.3(TP-3)
$5N6529: R33.2 U9.4(TP-4)
$5N6530: R34.2 U9.5(TP-5)
$5N6531: R35.2 U9.6(TP-6)
$5N6535: C27.1 C29.1 R38.1 U8.2(TP-2) U8.4(TP-4)
$6N2421: R52.1 U11.6
$6N2422: C48.1 R53.1 U11.14
$6N2438: C53.1 R60.1 X2.3
$6N2443: TP1.1 U11.21
$6N2448: TP2.1 U11.27
$6N2449: TP3.1 U11.28
$6N2451: R54.1 U11.38
$6N2454: R55.1 U11.39
$6N2464: R58.2 R59.2 U12.4(TP-4)

Pads without a net: ID1 1; ID2 1; ID4 1; ID6 1; ID7 1; J1 4 5 6 9 10 12 14 16 18 22 24 25 26 28 32 40; J2 5 7 9; J6 2 3 5 8 10 11 14 15 17 20 22 23; J11 1; NOREF#2 1; NOREF#6 1; NOREF#8 1; NOREF#10 1; NOREF#12 1; NOREF#14 1; NOREF#15 1; NOREF#16 1; NOREF#18 1; NOREF#19 1; NOREF#20 1; U1 10; U11 19 23 24 30 32 33 34 36 40 41 43 44 45 46 48 52 53 54 55 57 58 59 60

## Via types
v1: diameter 0.559, hole 0.254, TOP to BOTTOM, 1131 vias

## Routing (per net, layer and track width the routed paths; a pad name or vN(x,y) marks a point on that pad's centre or on a via; arc(x,y) is an arc through that point)
3V3: length 184.7
  TOP w0.254: 34.38,42.04 34.25,41.91 U3.44
  TOP w0.305: C20.1 34.77,42.44 34.38,42.04
  TOP w0.381: v1(35.59,43.63) 34.92,44.29 C16.1 34.81,43.06 C20.1
  TOP w0.508: 34.8,75.33 24.26,75.33 23.62,74.69 23.62,72.59 24.71,71.49 R14.2 R20.2 23.9,70.3 v1(23.88,70.27) ; 34.8,75.33 40.26,75.33 ; 34.8,75.33 34.92,75.46 34.92,81.59 R7.2 ; v1(31.83,25.54) 31.9,25.54 32.46,26.1 R48.2 ; R10.1 36.9,49.6 v1(36.9,50.51) 36.83,50.59 v1(36.83,53.18) ; 40.26,75.33 56.01,75.33 57.1,74.24 R68.1 R8.1 R63.1 ; 40.26,75.33 40.13,75.2 40.13,72.23 40.87,71.49 R61.2 ; v1(38.94,25.49) R32.2 ; R41.2 v1(40.46,25.49) 40.46,22.65 43.74,19.37 v1(49.53,19.37) ; v1(29.21,25.49) 29.06,25.65 R49.2 ; R36.2 R28.2 v1(48.44,28.77) ; R17.2 v1(54.71,37.08) ; R30.2 R31.2 48.26,32.76 R27.2 R12.2 v1(46.99,33.11)
  BOTTOM w0.508: v1(54.71,37.08) 55.04,37.41 55.04,54.22 v1(52.68,56.58) ; v1(36.9,58.26) 36.83,58.19 v1(36.83,53.18) ; 32,24.35 38.43,24.35 38.94,24.86 v1(38.94,25.49) v1(40.46,25.49) ; 32,24.35 30.05,24.35 29.21,25.19 v1(29.21,25.49) ; 32,24.35 31.83,24.53 v1(31.83,25.54) ; 11.89,69.69 23.29,69.69 v1(23.88,70.27) ; v1(49.53,19.37) 49.53,27.68 v1(48.44,28.77) 46.99,30.22 v1(46.99,33.11) 46.98,33.12 46.98,45.61 47.43,46.06 v1(47.43,57.9)
  vias: v1(11.43,70.32) v1(11.43,69.05) v1(13.92,48.1) v1(13.94,47.19) v1(35.76,66.67) v1(36.65,66.67)
3V3_D: length 69.2
  TOP w0.254: C46.1 35.69,104.04 35.63,103.99 U11.50
  TOP w0.381: R57.1 v1(44.45,105.88) ; v1(44.05,104.82) 44.05,104.3 R59.1 ; R56.1 v1(44.45,107.15) ; R29.1 62.33,97.22
  TOP w0.508: LB1.1 21.83,101.12 v1(21.84,101.11) ; C46.1 C47.1 34.04,104.55 33.53,105.06 v1(33.53,105.25) ; 27.97,84.37 27.97,86.28 25.37,88.87 23.75,88.87 23.11,89.5 R53.2 22.43,90.49 20.55,92.37 20.55,93.87 21.07,94.39 LB2.1
  BOTTOM w0.508: v1(44.05,104.82) 44.45,105.22 v1(44.45,105.88) ; v1(44.45,105.88) v1(44.45,107.15) v1(56.52,107.15) ; v1(44.45,105.88) 42.25,105.88 40.9,107.23 33.53,107.23 ; v1(33.53,105.25) 33.53,107.23 ; 33.53,107.23 28.27,107.23 26.37,105.33 26.37,103.17 24.31,101.11 v1(21.84,101.11)
5V: length 8.5
  TOP w0.508: v1(18.41,63.97) 19.2,63.97 19.71,64.48 19.71,69.72 J14.2
  vias: v1(18.41,62.7)
5V_IN: length 42.8
  TOP w0.381: R5.2 v1(24.77,51.5)
  TOP w0.508: D6.2 7.85,82.19 9.4,80.64 9.4,75.86 9.91,75.35 21.31,75.35 22.25,74.41 22.25,69.72 J14.1
  BOTTOM w0.381: v1(20.95,63.97) 20.95,55.31 v1(24.77,51.5)
5V_USB: length 13.8
  TOP w0.508: D7.2 7.85,86.18 8.36,86.69 12.7,86.69 13.41,87.39 RT1.1 13.88,89.59 R45.1 R37.2
5V_USB_D: length 35
  TOP w0.508: R45.2 9.73,92.17 8.69,91.13 RT1.2 7.62,89.12 6.45,87.95 6.45,82.47 8.51,80.41 8.51,75.56 9.47,74.59 19.86,74.59 J14.3
GND: length 257.2
  TOP w0.165: U11.15 25.66,93.75 25.37,93.46 25.37,92.65 v1(25.27,92.55) ; v1(25.27,98.71) 24.72,98.71 24.61,98.82 23.47,98.82 23.09,98.44 R52.2 ; C42.2 24.39,93.08 24.74,93.42 24.74,93.83 25.66,94.75 U11.13 ; v1(26.67,46.83) 27.15,46.35 27.15,43.63 v1(27.53,43.25) 27.81,42.97 28.3,42.97 29.03,42.23 C66.2
  TOP w0.203: v1(27.94,98.9) 27.79,98.75 U11.5 25.31,98.75 v1(25.27,98.71) ; 27.92,93.75 U11.15
  TOP w0.254: v1(42.34,97.74) 42.34,95.34 v1(41.94,94.94) ; 27.82,97.51 v1(27.94,97.63) ; v1(33.02,92.93) 32.63,92.55 U11.25 v1(32.63,89.43) ; 33.75,39.41 U3.45 33.75,42.14 v1(33.66,42.23) ; U11.51 35.14,101.27
  TOP w0.305: 27.03,41.88 C65.2
  TOP w0.381: C62.2 27.53,31.84 v1(27.64,31.74) ; v1(27.64,31.74) v1(26.72,31.74) ; v1(27.64,31.74) C69.2 ; C59.2 v1(30.81,29.05) ; C70.2 28.8,29.15 v1(29.21,29.56) ; v1(29.97,41.75) 29.49,42.23 C66.2 ; C53.2 23.9,102.35 v1(24.18,102.07) ; C41.2 28.69,88.36 v1(27.94,88.36) ; v1(30.28,43.32) 30.56,43.05 C67.2 ; v1(33.66,42.23) 33.96,42.54 C20.2 ; C68.2 v1(27.71,36.49) ; C16.2 33.96,43.74 C20.2 ; v1(33.25,43.02) C20.2 ; C65.2 27.61,41.62 28.27,40.96 C61.2 v1(29.16,40.96) ; R13.1 v1(41.91,107.15) ; C6.1 v1(29.84,55.08) 29.57,55.36 D8.2 ; C75.2 v1(27.76,39.06) ; v1(41.15,94.23) 41.14,94.23 ; C42.2 24.08,93.02 v1(24.08,92.12) ; C63.2 v1(25.2,36.26) ; C76.2 25.3,33.42 C74.2 v1(23.29,33.42) ; C52.2 v1(22.23,105.25) ; C73.2 v1(26.41,35.15) ; 41.91,94.96 v1(41.94,94.94)
  TOP w0.508: J6.29 2.62,105.47 ; J6.29 4.12,104.63 ; J6.29 1.12,104.63 ; 58.18,54.7 J12.7 ; J12.7 59.13,55.73 ; J12.7 60.16,54.7 ; J1.20 3.25,41.57 ; J1.20 3.25,39.39 ; J1.20 2.16,40.48 ; J1.20 4.34,40.48 ; 8.22,93.51 J6.28 9.86,94.35 ; 9.69,103.03 J6.25 8.27,103.03 J6.24 ; J1.19 6.88,40.48 ; J1.19 4.7,40.48 ; J1.19 5.79,39.39 ; J1.19 5.79,41.57 ; J1.21 5.79,39.03 ; J1.21 4.7,37.94 ; J1.21 5.79,36.85 ; J1.21 6.88,37.94 ; J5.2 61.42,106.52 ; J5.2 60.33,107.61 ; J5.2 59.23,106.52 ; J5.2 60.33,105.43 ; 55.49,83.66 J9.4 56.52,84.69 ; J3.2 3.35,86.2 ; J3.2 4.45,85.11 ; J3.2 5.54,86.2 ; J3.2 4.45,87.29 ; 60.33,102.89 J5.1 ; J5.1 60.33,105.07 ; J5.1 61.42,103.98 ; J5.1 59.23,103.98 ; 9.84,12.54 J10.8 ; J10.8 10.87,11.45 ; J10.8 10.87,13.57 ; J10.8 11.9,12.54 ; 5.54,83.66 J3.1 ; J3.1 3.35,83.66 ; J3.1 4.45,82.57 ; J3.1 4.45,84.75 ; 10.87,39.45 J11.6 ; J11.6 9.78,40.48 ; J11.6 10.87,41.51 ; J11.6 11.9,40.48 ; J2.40 65.3,15.08 ; J2.40 63.12,15.08 ; J2.40 64.21,13.99 ; J2.40 64.21,16.17 ; 10.87,36.91 J11.7 ; J11.7 9.78,37.94 ; J11.7 11.9,37.94 ; J11.7 10.87,38.97 ; J2.10 64.21,54.37 ; J2.10 65.38,53.18 ; J2.10 63.19,53.18 ; v1(59.69,76.17) 59.69,80.18 ; J6.13 8.27,95.43 J6.26 9.21,95.43 ; 40.64,84.69 J8.4 39.61,83.66 ; v1(61.72,76.14) 61.57,76.29 61.57,80.23 v1(61.72,80.38) ; 9.86,104.11 J6.27 8.22,104.95 ; 46.75,83.66 J8.2 ; J8.2 44.69,83.66 ; J8.2 45.72,84.69 ; 61.59,82.63 J9.2 ; J9.2 62.62,83.66 ; J9.2 61.59,84.69 ; J6.30 2.62,92.99 ; J6.30 1.12,93.83 ; J6.30 4.12,93.83 ; 4.7,55.72 J1.7 5.79,56.81
  BOTTOM w0.508: 9.84,37.94 J11.7 ; J11.7 10.87,38.97 ; J11.7 11.9,37.94 ; J12.7 59.13,55.73 ; J12.7 60.16,54.7 ; J12.7 58.1,54.7 ; J12.7 59.13,53.67 ; J5.2 60.33,107.61 ; J5.2 60.33,105.43 ; J5.2 59.23,106.52 ; J5.2 61.42,106.52 ; J1.20 3.25,39.39 ; J1.20 2.16,40.48 ; J1.20 3.25,41.57 ; J1.20 4.34,40.48 ; J9.4 55.49,83.66 ; J9.4 56.52,84.69 ; J9.4 57.54,83.66 ; J3.1 4.45,84.75 ; J3.1 5.54,83.66 ; J3.1 3.35,83.66 ; J3.1 4.45,82.57 ; 65.3,15.08 J2.40 ; J2.40 64.21,13.99 ; J2.40 63.12,15.08 ; J2.40 64.21,16.17 ; 67.84,40.48 J2.19 ; J2.19 66.75,39.39 ; J2.19 66.75,41.57 ; J2.19 65.66,40.48 ; J6.30 2.62,92.99 ; J6.30 4.12,93.83 ; J6.30 1.12,93.83 ; J1.19 5.79,41.57 ; J1.19 5.79,39.39 ; J1.19 6.88,40.48 ; J1.19 4.7,40.48 ; 6.88,37.94 J1.21 ; J1.21 4.7,37.94 ; J1.21 5.79,39.03 ; 60.33,102.89 J5.1 ; J5.1 59.23,103.98 ; J5.1 61.42,103.98 ; J5.1 60.33,105.07 ; J1.7 5.79,54.63 ; J1.7 6.88,55.72 ; J1.7 4.7,55.72 ; J1.7 5.79,56.81 ; J8.2 45.72,84.69 ; J8.2 45.72,82.63 ; J8.2 44.69,83.66 ; J8.2 46.75,83.66 ; 11.9,12.54 J10.8 ; J10.8 9.84,12.54 ; J10.8 10.87,13.57 ; J10.8 10.87,11.51 ; J8.4 39.61,83.66 ; J8.4 40.64,82.63 ; J8.4 40.64,84.69 ; J8.4 41.67,83.66 ; 61.62,76.24 v1(61.72,76.14) ; J6.13 8.27,95.43 J6.26 9.23,95.43 v1(9.4,95.6) ; 9.59,103.03 J6.25 8.27,103.03 J6.24 ; 34.92,75.81 34.92,80.82 ; J2.10 63.12,53.18 ; J2.10 64.21,52.09 ; J2.10 64.21,54.27 ; J2.10 65.3,53.18 ; 62.62,83.66 J9.2 ; J9.2 60.57,83.66 ; J9.2 61.59,84.69 ; 9.84,40.48 J11.6 ; J11.6 10.87,41.51 ; J11.6 11.9,40.48 ; J11.6 10.87,39.45 ; 8.22,93.51 J6.28 9.86,94.35 ; J3.2 4.45,87.29 ; J3.2 3.35,86.2 ; J3.2 5.54,86.2 ; J3.2 4.45,85.11 ; 8.22,104.95 J6.27 9.86,104.11 ; J6.29 1.12,104.63 ; J6.29 2.62,105.47 ; J6.29 4.12,104.63 ; v1(59.69,76.17) 59.69,80.18 ; 61.57,76.4 61.57,80.13 ; v1(2.54,92.55) 2.62,92.63
  BOTTOM w0.762: 8.97,80.71 8.97,75.74
  vias: v1(0.81,106.94) v1(0.81,105.67) v1(0.81,92.97) v1(0.81,91.7) v1(0.81,90.43) v1(0.81,89.16) v1(0.81,87.89) v1(0.81,86.62) v1(0.81,85.35) v1(0.81,84.08) v1(0.81,82.81) v1(0.81,73.92) v1(0.81,72.65) v1(0.81,71.38) v1(0.81,70.11) v1(0.81,68.84) v1(0.81,67.57) v1(0.81,66.3) v1(0.81,65.03) v1(0.81,63.76) v1(0.81,62.49) v1(0.81,61.22) v1(0.81,59.95) v1(0.81,58.68) v1(0.81,57.41) v1(0.81,56.14) v1(0.81,54.87) v1(0.81,53.6) v1(0.81,52.33) v1(0.81,51.06) v1(0.81,49.79) v1(0.81,48.52) v1(0.81,47.25) v1(0.81,45.98) v1(0.81,44.71) v1(0.81,43.44) v1(0.81,42.17) v1(0.81,40.9) v1(0.81,39.63) v1(0.81,38.36) v1(0.81,37.09) v1(0.81,35.82) v1(0.81,34.55) v1(0.81,33.28) v1(0.81,32.01) v1(0.81,30.74) v1(0.81,29.47) v1(0.81,28.2) v1(0.81,26.93) v1(0.81,25.66) v1(0.81,24.39) v1(0.81,23.12) v1(0.81,21.85) v1(0.81,20.58) v1(0.81,19.31) v1(0.81,18.04) v1(0.81,16.77) v1(0.81,15.5) v1(0.81,14.23) v1(0.81,12.96) v1(1.03,108.19) v1(1.22,81.53) v1(1.22,11.76) v1(1.88,109.14) v1(2.22,10.97) v1(2.54,108.42) v1(2.54,107.15) v1(2.54,105.88) v1(2.54,90.01) v1(2.54,88.1) v1(2.54,80.48) v1(2.54,67.15) v1(3.11,109.47) v1(3.17,75.4) v1(3.17,12.54) v1(3.48,10.81) v1(3.81,108.42) v1(3.81,107.15) v1(3.81,105.88) v1(3.81,92.55) v1(3.81,90.01) v1(3.81,88.1) v1(3.81,74.13) v1(4.38,109.47) v1(4.45,41.75) v1(4.45,39.21) v1(4.45,29.05) v1(4.75,10.81) v1(5.08,87.47) v1(5.08,80.48) v1(5.65,109.47) v1(5.71,91.28) v1(5.71,76.04) v1(5.71,67.15) v1(5.71,12.54) v1(6.02,10.81) v1(6.35,107.79) v1(6.35,106.52) v1(6.35,105.25) v1(6.35,93.18) v1(6.35,90.01) v1(6.35,74.13) v1(6.35,69.69) v1(6.92,109.47) v1(6.99,91.28) v1(6.99,72.86) v1(6.99,71.59) v1(6.99,70.48) v1(7.11,56.74) v1(7.29,10.81) v1(7.4,80.36) v1(7.4,76.04) v1(7.62,107.79) v1(7.62,106.52) v1(7.62,105.25) v1(7.62,93.18) v1(7.62,39.21) v1(7.62,23.97) v1(7.62,22.06) v1(7.8,32.12) v1(8.26,72.86) v1(8.26,71.59) v1(8.26,70.48) v1(8.26,40.48) v1(8.26,37.94) v1(8.26,30.32) v1(8.26,27.14) v1(8.26,12.54) v1(8.56,10.81) v1(8.89,107.79) v1(8.89,106.52) v1(8.89,105.25) v1(8.89,69.05) v1(8.89,67.78) v1(8.89,66.67) v1(8.89,64.61) v1(8.89,23.97) v1(8.89,22.06) v1(9.53,93.18) v1(9.53,32.22) v1(9.83,10.81) v1(10.16,108.42) v1(10.16,107.15) v1(10.16,105.88) v1(10.16,104.61) v1(10.16,103.34) v1(10.16,102.07) v1(10.16,96.36) v1(10.16,95.09) v1(10.16,93.82) v1(10.16,80.48) v1(10.16,69.05) v1(10.16,67.78) v1(10.16,66.67) v1(10.16,64.61) v1(10.16,62.7) v1(10.16,61.43) v1(10.16,58.26) v1(10.79,76.04) v1(10.79,73.83) v1(11.1,10.81) v1(11.43,104.61) v1(11.43,103.34) v1(11.43,102.07) v1(11.43,80.48) v1(11.43,32.22) v1(12.06,76.04) v1(12.37,10.81) v1(12.57,44.54) v1(12.7,102.71) v1(12.7,81.75) v1(12.7,63.97) v1(12.7,62.7) v1(12.7,61.43) v1(12.7,60.16) v1(12.7,58.89) v1(12.7,48.86) v1(12.7,41.75) v1(12.7,40.48) v1(12.7,39.21) v1(12.7,37.94) v1(12.7,26.13) v1(12.98,73.8) v1(13.08,22.83) v1(13.08,20.16) v1(13.34,86.2) v1(13.34,80.48) v1(13.34,76.04) v1(13.34,67.78) v1(13.46,45.43) v1(13.64,10.81) v1(13.8,101.06) v1(13.8,98.16) v1(13.97,96.99) v1(13.97,63.97) v1(13.97,62.7) v1(13.97,41.75) v1(13.97,39.21) v1(13.97,34.13) v1(13.97,32.86) v1(13.97,31.59) v1(13.97,30.32) v1(13.97,27.78) v1(13.97,26.13) v1(13.97,18.25) v1(13.97,12.54) v1(14.35,46.32) v1(14.35,24.22) v1(14.61,103.98) v1(14.55,101.74) v1(14.61,76.04) v1(14.61,22.06) v1(14.91,10.81) v1(15.24,102.71) v1(15.24,98.26) v1(15.24,96.36) v1(15.24,95.09) v1(15.24,93.82) v1(15.24,92.55) v1(15.24,90.64) v1(15.24,89.37) v1(15.24,81.75) v1(15.24,80.48) v1(15.24,60.16) v1(15.24,57.62) v1(15.24,43.02) v1(15.24,40.48) v1(15.24,35.4) v1(15.34,17.7) v1(15.37,20.03) v1(15.57,101.06) v1(15.62,33.49) v1(15.62,31.59) v1(15.6,29.86) v1(15.57,27.96) v1(15.6,25.95) v1(15.81,109.47) v1(15.88,76.04) v1(15.88,23.33) v1(16.18,10.81) v1(16.41,16.68) v1(16.51,107.79) v1(16.51,104.61) v1(16.51,98.26) v1(16.51,96.36) v1(16.51,95.09) v1(16.51,93.82) v1(16.51,92.55) v1(16.51,90.64) v1(16.51,89.37) v1(16.51,61.43) v1(16.51,44.29) v1(16.51,43.02) v1(16.51,41.75) v1(16.51,36.67) v1(16.51,34.13) v1(16.56,73.83) v1(16.81,27.98) v1(16.84,25.98) v1(16.89,31.59) v1(16.87,29.86) v1(17.04,19.32) v1(17.08,109.47) v1(17.14,100.45) v1(17.14,81.75) v1(17.14,80.48) v1(17.14,54.27) v1(17.14,46.32) v1(17.14,13.85) v1(17.27,99.03) v1(17.45,10.81) v1(17.48,22.04) v1(17.78,107.15) v1(17.78,105.88) v1(17.78,104.61) v1(17.78,103.34) v1(17.78,102.07) v1(17.78,97.63) v1(17.78,96.36) v1(17.78,95.09) v1(17.78,93.82) v1(17.78,92.55) v1(17.78,91.28) v1(17.78,90.01) v1(17.78,88.74) v1(17.78,87.47) v1(17.78,61.43) v1(17.78,38.57) v1(17.78,36.67) v1(17.91,76.04) v1(17.93,25.95) v1(17.88,18.2) v1(17.96,27.98) v1(18.21,20.57) v1(18.35,109.47) v1(18.41,107.79) v1(18.41,100.45) v1(18.41,98.9) v1(18.41,32.22) v1(18.41,13.85) v1(18.72,10.81) v1(18.8,34.89) v1(18.9,73.6) v1(19.02,27.93) v1(19.05,102.07) v1(19.05,97.63) v1(19.05,87.47) v1(19.05,70.96) v1(19.05,61.43) v1(19.05,39.84) v1(19.08,30.27) v1(19.05,25.9) v1(19.05,24.07) v1(19.08,21.99) v1(19.62,109.47) v1(19.68,107.79) v1(19.68,96.36) v1(19.68,95.09) v1(19.68,93.82) v1(19.68,91.28) v1(19.68,89.37) v1(19.68,53.48) v1(19.66,19.98) v1(19.68,13.85) v1(19.88,99.6) v1(19.94,43.15) v1(19.94,41.37) v1(19.99,10.81) v1(20.07,38.7) v1(20.07,36.8) v1(20.19,34.89) v1(20.32,102.07) v1(20.32,81.75) v1(20.32,80.48) v1(20.32,76.04) v1(20.32,61.43) v1(20.32,30.83) v1(20.32,27.78) v1(20.35,25.93) v1(20.32,24.1) v1(20.35,21.91) v1(20.7,88.1) v1(20.89,109.47) v1(20.9,51.54) v1(20.95,107.79) v1(20.95,98.52) v1(20.95,13.85) v1(21.26,10.81) v1(21.59,102.07) v1(21.59,90.01) v1(21.59,61.43) v1(21.64,30.88) v1(21.59,26.51) v1(21.59,23.97) v1(21.72,33.49) v1(21.72,27.58) v1(21.72,21.94) v1(22.02,93.9) v1(21.97,92.04) v1(22.16,109.47) v1(22.23,107.79) v1(22.23,106.52) v1(22.23,98.26) v1(22.23,96.82) v1(22.23,88.74) v1(22.23,20.16) v1(22.23,15.08) v1(22.23,13.81) v1(22.35,51.5) v1(22.53,10.81) v1(22.86,102.07) v1(22.86,80.48) v1(22.86,61.43) v1(22.86,45.56) v1(22.86,44.29) v1(22.86,41.75) v1(23.43,109.47) v1(23.5,107.79) v1(23.5,106.52) v1(23.5,96.82) v1(23.5,71.47) v1(23.5,58.26) v1(23.5,56.99) v1(23.5,55.72) v1(23.5,54.45) v1(23.5,49.37) v1(23.5,48.1) v1(23.5,23.97) v1(23.8,10.81) v1(24,88.1) v1(24.13,89.63) v1(24.13,65.88) v1(24.13,61.43) v1(24.13,27.78) v1(24.13,26.51) v1(24.13,13.81) v1(24.7,109.47) v1(24.77,107.79) v1(24.77,106.52) v1(24.77,58.26) v1(24.77,56.99) v1(24.77,55.72) v1(24.89,95.47) v1(25.02,90.9) v1(25.07,10.81) v1(25.27,89.63) v1(25.4,76.04) v1(25.4,65.88) v1(25.4,61.43) v1(25.4,49.37) v1(25.4,48.1) v1(25.4,45.56) v1(25.4,23.33) v1(25.4,20.16) v1(25.55,26.21) v1(25.65,105.25) v1(25.65,87.6) v1(25.97,109.47) v1(26.04,70.9) v1(26.04,69.69) v1(26.04,68.42) v1(26.04,51.5) v1(26.34,10.81) v1(26.37,42.99) v1(26.67,90.64) v1(26.67,89.37) v1(26.67,82.39) v1(26.67,80.48) v1(26.67,65.88) v1(26.67,49.37) v1(26.77,42.13) v1(26.92,85.82) v1(26.92,84.8) v1(26.92,57.12) v1(27.24,109.47) v1(27.3,51.54) v1(27.3,22.06) v1(27.61,10.81) v1(27.94,101.44) v1(27.94,100.17) v1(27.94,96.36) v1(27.94,95.09) v1(27.94,92.93) v1(27.94,71.59) v1(27.94,70.45) v1(27.94,65.88) v1(27.94,48.1) v1(28.51,109.47) v1(28.57,106.52) v1(28.57,20.16) v1(28.88,10.81) v1(29.21,101.44) v1(29.21,100.17) v1(29.21,98.9) v1(29.21,97.63) v1(29.21,96.36) v1(29.21,95.09) v1(29.21,92.93) v1(29.18,76.12) v1(29.21,71.59) v1(29.21,70.45) v1(29.21,65.88) v1(29.21,51.27) v1(29.21,48.73) v1(29.21,46.83) v1(29.21,45.56) v1(29.78,109.47) v1(29.84,22.06) v1(30.15,10.81) v1(30.3,31.29) v1(30.48,101.44) v1(30.48,100.17) v1(30.48,98.9) v1(30.48,97.63) v1(30.48,96.36) v1(30.48,95.09) v1(30.48,92.93) v1(30.48,71.59) v1(30.48,70.45) v1(30.48,65.88) v1(30.48,63.34) v1(30.48,60.8) v1(30.48,58.26) v1(30.48,55.72) v1(30.73,30.35) v1(31.05,109.47) v1(31.11,86.2) v1(31.11,80.48) v1(31.42,10.81) v1(31.75,101.44) v1(31.75,100.17) v1(31.75,98.9) v1(31.75,97.63) v1(31.75,96.36) v1(31.75,95.09) v1(31.75,92.93) v1(31.75,82.39) v1(31.75,70.32) v1(31.75,69.05) v1(31.75,20.16) v1(32,88.49) v1(32.32,109.47) v1(32.38,106.52) v1(32.38,58.89) v1(32.38,56.35) v1(32.38,53.81) v1(32.38,51.91) v1(32.38,49.37) v1(32.38,38.57) v1(32.38,37.3) v1(32.38,36.03) v1(32.38,34.76) v1(32.38,33.49) v1(32.61,46.96) v1(32.69,10.81) v1(33.02,101.44) v1(33.02,100.17) v1(33.02,98.9) v1(33.02,97.63) v1(33.02,96.36) v1(33.02,95.09) v1(33.02,85.95) v1(33.02,70.32) v1(33.02,69.05) v1(33.02,20.16) v1(33.4,22.47) v1(33.59,109.47) v1(33.6,50.51) v1(33.66,53.18) v1(33.66,38.57) v1(33.66,37.3) v1(33.66,36.03) v1(33.66,34.76) v1(33.66,33.49) v1(33.96,10.81) v1(34.16,80.48) v1(34.16,76.12) v1(34.29,101.44) v1(34.29,100.17) v1(34.29,98.9) v1(34.29,97.63) v1(34.29,96.36) v1(34.29,95.09) v1(34.29,92.93) v1(34.29,70.32) v1(34.29,69.05) v1(34.29,16.35) v1(34.72,89.02) v1(34.86,109.47) v1(34.92,85.95) v1(34.92,50.64) v1(34.92,38.57) v1(34.92,37.3) v1(34.92,36.03) v1(34.92,34.76) v1(34.92,33.49) v1(35.05,20.74) v1(35.23,10.81) v1(35.56,106.39) v1(35.56,101.44) v1(35.56,100.17) v1(35.56,98.9) v1(35.56,97.63) v1(35.56,96.36) v1(35.56,95.09) v1(35.56,92.93) v1(35.56,70.32) v1(35.56,69.05) v1(35.56,64.61) v1(35.56,63.34) v1(35.56,62.07) v1(35.56,60.8) v1(35.56,59.53) v1(35.56,58.26) v1(35.56,56.35) v1(35.56,54.45) v1(35.56,53.18) v1(35.71,80.48) v1(35.71,76.12) v1(36.13,109.47) v1(36.2,38.57) v1(36.2,37.3) v1(36.2,36.03) v1(36.2,34.76) v1(36.2,33.49) v1(36.42,87.9) v1(36.5,10.81) v1(36.83,106.39) v1(36.83,92.93) v1(36.83,70.96) v1(37.08,89.78) v1(37.31,18.46) v1(37.4,109.47) v1(37.54,87.98) v1(37.47,37.3) v1(37.47,36.03) v1(37.47,34.76) v1(37.47,33.49) v1(37.77,10.81) v1(38.1,101.44) v1(38.1,70.96) v1(38.1,65.88) v1(38.1,64.61) v1(38.1,63.34) v1(38.1,62.07) v1(38.1,60.8) v1(38.1,59.53) v1(38.1,54.45) v1(38.67,109.47) v1(38.73,55.72) v1(38.91,88.69) v1(39.04,10.81) v1(39.24,106.27) v1(39.37,102.71) v1(39.37,101.44) v1(39.4,94.53) v1(39.37,76.04) v1(39.37,70.96) v1(39.37,39.84) v1(39.5,92.93) v1(39.83,49.62) v1(39.83,48.23) v1(39.94,109.47) v1(39.93,15.79) v1(40.01,100.17) v1(40.01,87.47) v1(40.01,85.56) v1(39.98,80.25) v1(40.01,12.54) v1(40.08,47.08) v1(40.21,31.67) v1(40.26,103.98) v1(40.31,10.81) v1(40.64,106.27) v1(40.64,67.15) v1(40.64,65.88) v1(40.64,64.61) v1(40.64,63.34) v1(40.64,62.07) v1(40.64,60.8) v1(40.64,59.53) v1(40.64,55.72) v1(40.64,53.81) v1(40.88,50.78) v1(41.07,31.21) v1(41.21,109.47) v1(41.27,69.05) v1(41.27,39.84) v1(41.58,10.81) v1(41.91,102.71) v1(41.91,99.53) v1(41.91,89.37) v1(41.91,85.56) v1(41.91,76.04) v1(41.91,69.74) v1(41.91,67.15) v1(41.91,51.27) v1(42.24,47.21) v1(42.48,109.47) v1(42.55,104.61) v1(42.47,70.78) v1(42.67,93.06) v1(42.85,10.81) v1(43.18,93.82) v1(43.18,85.56) v1(43.18,69.05) v1(43.18,67.15) v1(43.18,51.27) v1(43.38,47.21) v1(43.61,39.54) v1(43.75,109.47) v1(43.81,102.71) v1(43.81,71.59) v1(44.12,10.81) v1(44.37,15.64) v1(44.45,101.44) v1(44.45,100.17) v1(44.45,98.9) v1(44.45,97.63) v1(44.45,70.96) v1(44.45,67.15) v1(44.45,63.34) v1(44.45,62.07) v1(44.45,60.8) v1(44.45,59.53) v1(44.45,55.72) v1(44.45,53.81) v1(44.52,51.15) v1(45.02,109.47) v1(45.09,93.18) v1(45.09,89.37) v1(45.39,10.81) v1(45.72,100.17) v1(45.72,86.83) v1(45.72,85.56) v1(45.72,80.28) v1(45.72,70.96) v1(45.72,67.15) v1(45.72,63.34) v1(45.72,62.07) v1(45.97,76.12) v1(46.29,109.47) v1(46.66,10.81) v1(46.99,100.17) v1(46.99,85.56) v1(46.99,70.96) v1(46.99,67.15) v1(46.99,63.34) v1(46.99,15.71) v1(47.12,96.23) v1(47.56,109.47) v1(47.93,10.81) v1(48.26,102.07) v1(48.26,100.8) v1(48.26,67.15) v1(48.26,63.34) v1(48.83,109.47) v1(49.2,10.81) v1(49.53,67.15) v1(49.53,63.34) v1(49.53,15.08) v1(49.78,76.04) v1(50.1,109.47) v1(50.16,105.88) v1(50.16,104.61) v1(50.16,103.34) v1(50.16,102.07) v1(50.16,100.8) v1(50.47,10.81) v1(50.75,42.26) v1(50.8,67.15) v1(50.8,63.34) v1(50.8,56.33) v1(50.8,53.81) v1(50.8,51.91) v1(50.8,49.37) v1(50.8,47.46) v1(50.8,46.19) v1(50.8,44.92) v1(51.28,59.05) v1(51.37,109.47) v1(51.44,99.53) v1(51.44,86.83) v1(51.74,10.81) v1(52.04,80.28) v1(52.07,105.88) v1(52.07,104.61) v1(52.07,103.34) v1(52.07,101.44) v1(52.07,83.66) v1(52.07,70.96) v1(52.07,69.69) v1(52.07,68.42) v1(52.07,67.15) v1(52.07,64.61) v1(52.07,15.08) v1(52.64,109.47) v1(52.7,96.36) v1(52.7,94.45) v1(52.7,51.91) v1(52.7,49.37) v1(52.7,47.46) v1(52.7,46.19) v1(52.7,44.92) v1(52.83,41.98) v1(53.01,10.81) v1(53.34,101.39) v1(53.34,70.96) v1(53.34,67.15) v1(53.34,65.88) v1(53.34,54.45) v1(53.85,59.15) v1(53.91,109.47) v1(53.98,15.08) v1(54.25,56.15) v1(54.28,10.81) v1(54.36,42) v1(54.61,76.04) v1(54.61,70.96) v1(54.61,67.15) v1(55.22,80.28) v1(55.24,15.08) v1(55.37,105.28) v1(55.55,10.81) v1(55.78,42) v1(55.88,85.56) v1(55.88,70.96) v1(55.88,55.72) v1(55.88,53.18) v1(55.88,51.91) v1(56.52,65.24) v1(56.52,49.37) v1(56.52,47.46) v1(56.52,45.56) v1(56.52,15.08) v1(56.82,10.81) v1(57.02,55.08) v1(57.15,94.18) v1(57.15,85.56) v1(57.15,59.15) v1(57.15,13.17) v1(57.78,99.53) v1(57.78,65.88) v1(57.94,76.04) v1(58.04,69.18) v1(58.04,67.15) v1(58.09,10.81) v1(58.42,106.52) v1(58.42,103.34) v1(58.52,80.28) v1(59.05,99.53) v1(59.05,94.45) v1(59.36,10.81) v1(60.63,10.81) v1(60.96,85.56) v1(61.9,10.81) v1(62.15,107.03) v1(62.23,85.56) v1(62.23,72.86) v1(62.23,53.18) v1(62.26,65.24) v1(62.8,109.47) v1(62.87,103.34) v1(62.87,102.07) v1(62.87,69.69) v1(63.17,10.81) v1(63.39,85.56) v1(64.07,109.47) v1(64.14,103.34) v1(64.14,102.07) v1(64.14,100.8) v1(64.14,99.53) v1(64.14,98.26) v1(64.14,96.36) v1(64.14,94.45) v1(64.14,67.15) v1(64.44,10.81) v1(64.77,12.54) v1(65.34,109.47) v1(65.41,103.34) v1(65.41,102.07) v1(65.41,96.36) v1(65.41,86.83) v1(65.41,80.48) v1(65.41,74.13) v1(65.56,94.45) v1(65.71,10.81) v1(66.61,109.47) v1(66.67,103.34) v1(66.67,102.07) v1(66.67,100.8) v1(66.98,10.81) v1(67.31,80.48) v1(67.31,67.15) v1(67.86,109.27) v1(68.19,11.19) v1(68.35,97.68) v1(68.83,108.45) v1(69.01,12.17) v1(69.19,107.23) v1(69.19,104.86) v1(69.19,103.59) v1(69.19,102.32) v1(69.19,101.05) v1(69.19,99.78) v1(69.19,98.51) v1(69.19,97.24) v1(69.19,95.97) v1(69.19,94.7) v1(69.19,93.43) v1(69.19,92.16) v1(69.19,90.94) v1(69.19,89.67) v1(69.19,88.4) v1(69.17,87.2) v1(69.17,85.93) v1(69.19,84.54) v1(69.19,83.27) v1(69.19,82) v1(69.19,74.38) v1(69.19,73.11) v1(69.19,71.84) v1(69.19,70.57) v1(69.19,69.3) v1(69.19,68.03) v1(69.19,66.76) v1(69.19,65.49) v1(69.19,64.22) v1(69.19,62.95) v1(69.19,61.68) v1(69.19,60.41) v1(69.19,59.14) v1(69.19,57.87) v1(69.19,56.6) v1(69.19,55.33) v1(69.19,54.06) v1(69.19,52.79) v1(69.19,51.52) v1(69.19,50.25) v1(69.19,48.98) v1(69.19,47.71) v1(69.19,46.44) v1(69.19,45.17) v1(69.19,43.9) v1(69.19,42.63) v1(69.19,41.36) v1(69.19,40.09) v1(69.19,38.82) v1(69.19,37.55) v1(69.19,36.28) v1(69.19,35.01) v1(69.19,33.74) v1(69.19,32.47) v1(69.19,31.2) v1(69.19,29.93) v1(69.19,28.66) v1(69.19,27.39) v1(69.19,26.12) v1(69.19,24.85) v1(69.19,23.58) v1(69.19,22.31) v1(69.19,21.04) v1(69.19,19.77) v1(69.19,18.5) v1(69.19,17.23) v1(69.19,15.96) v1(69.19,14.69) v1(69.19,13.42)
GND1: length 9
  TOP w0.254: U3.46 33.25,41.75 32.71,42.28 32.71,45 33.27,45.56 C14.2 33.96,46.54 C13.2 33.67,48.06 R9.1
VCCIO: length 54.7
  TOP w0.254: U11.20 30.14,89.06 C41.1 ; U11.42 39.35,97.75 C37.1 ; U11.56 32.63,104.5 C40.1 ; C39.1 U11.31
  TOP w0.508: 43.05,98.44 43.01,98.4 C37.1 ; 43.05,98.44 43.05,94.68 37.39,89.02 v1(36.35,89.02) 36.35,89.02 36.35,88.97 36.08,89.24 C39.1 ; 43.05,98.44 43.05,102.84 v1(41.27,104.61) ; v1(31.62,104.75) C40.1 ; v1(30.54,87.09) 30.21,87.42 C38.1 ; C38.1 C41.1 ; C38.1 LB3.2
  BOTTOM w0.508: v1(31.62,104.75) 32.52,103.85 36.4,103.85 37.87,105.33 40.56,105.33 v1(41.27,104.61) ; v1(30.54,87.09) 34.42,87.09 v1(36.35,89.02)
